# Altium PCB Retro_Stat_PCB_Layout.PcbDoc (part 1 of 2)
Units mil, origin at the board's own origin, x right, y up, seen from the top; angles counter-clockwise.
Board outline 2340 x 2340 mil, 4 copper layers (Top Layer, Vcc, Gnd, Bottom Layer), stack 60.834 mil thick; 70 components, 57 nets, 289 pads, 146 vias.
Unrouted connection lines stored in the file: 1.
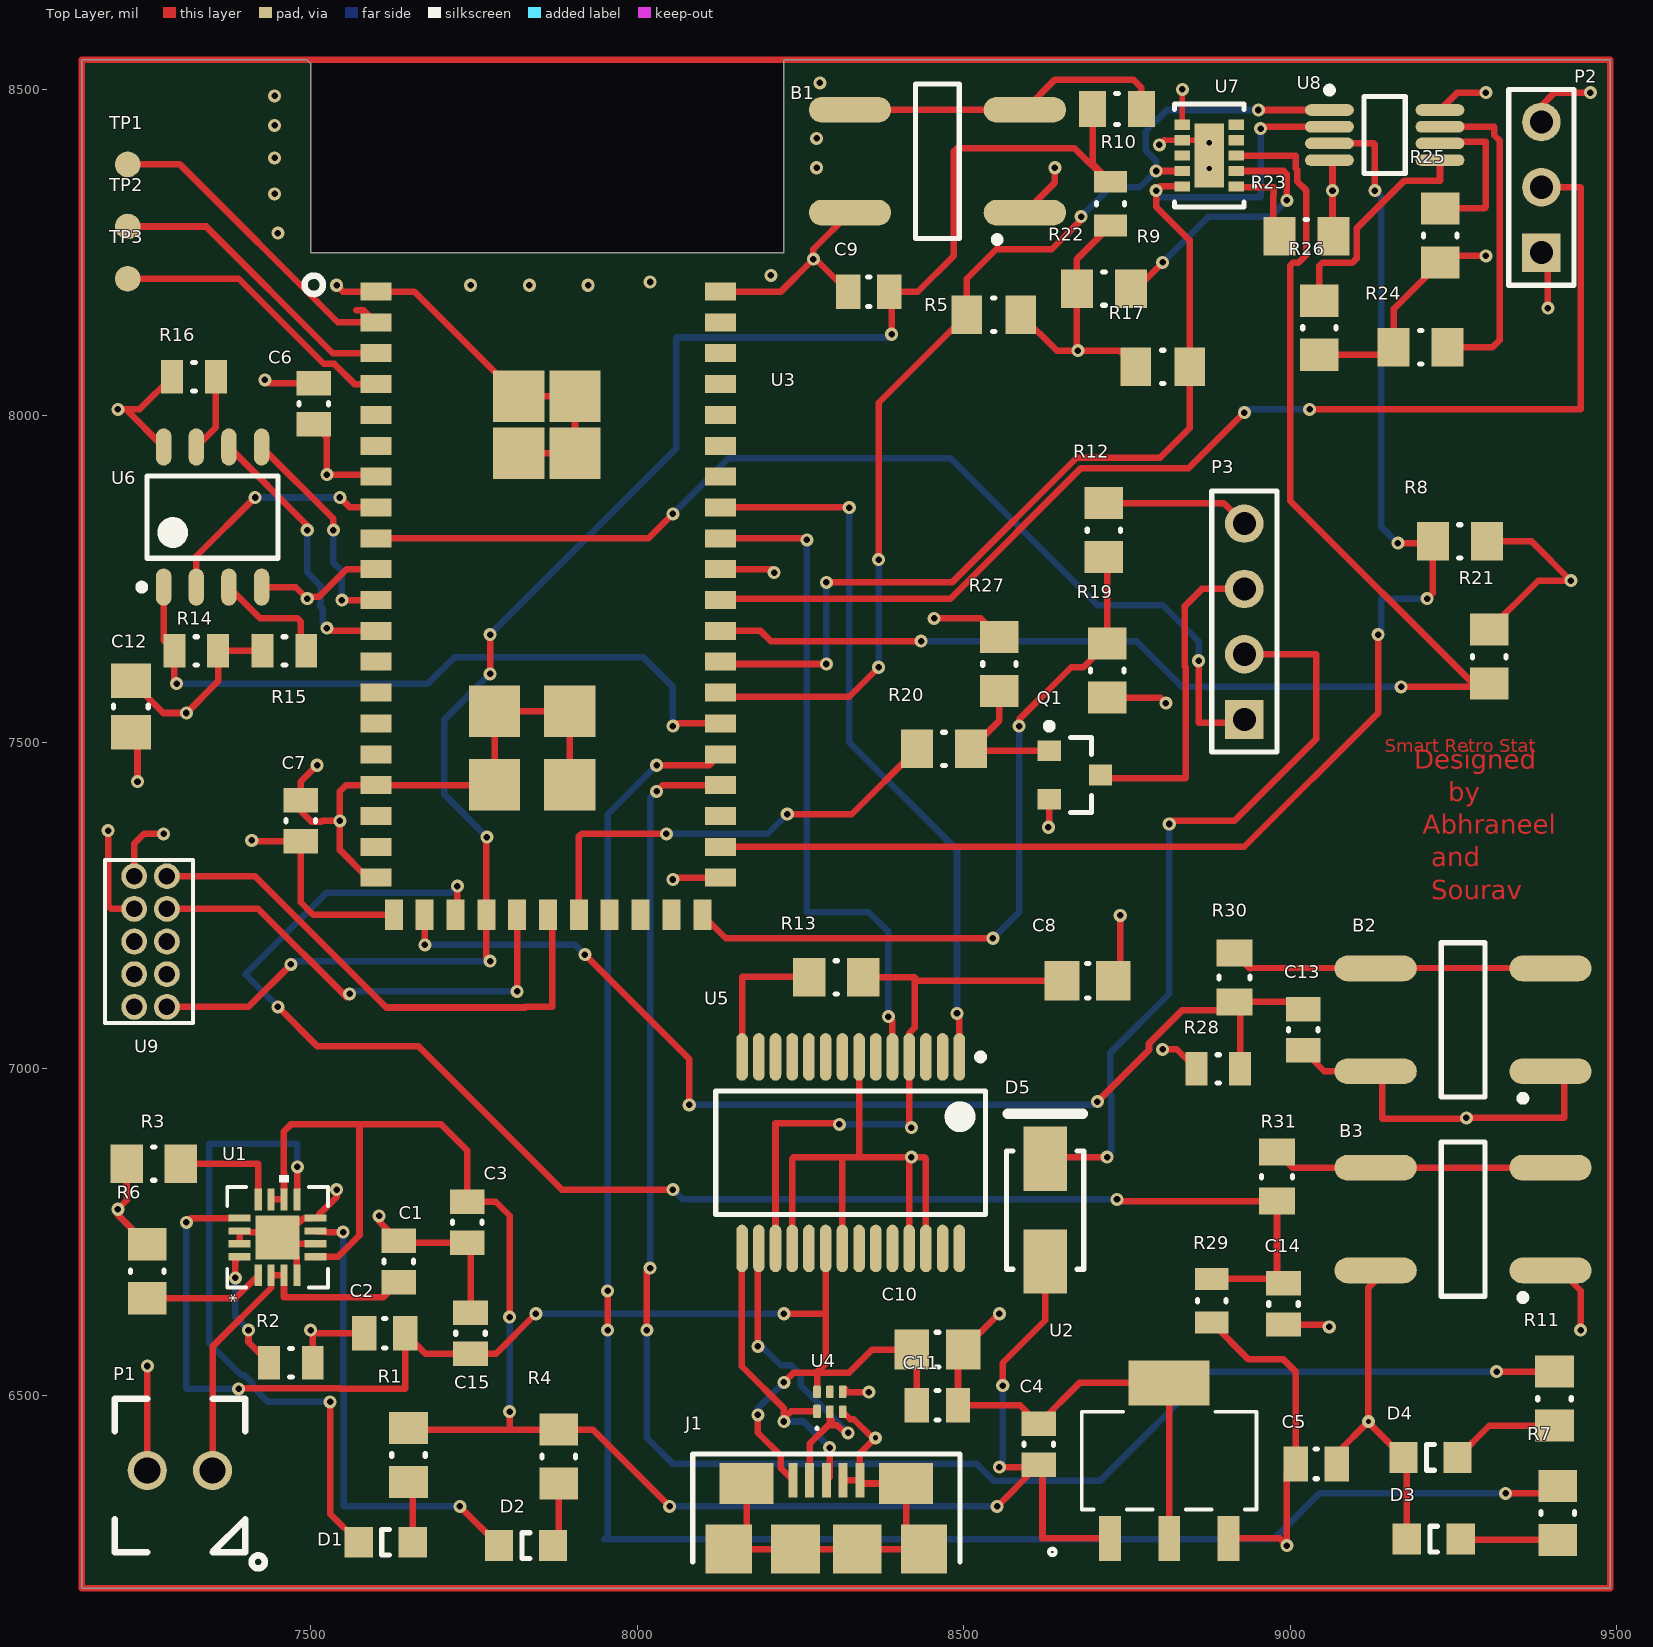
[diagram p0: Top Layer view]
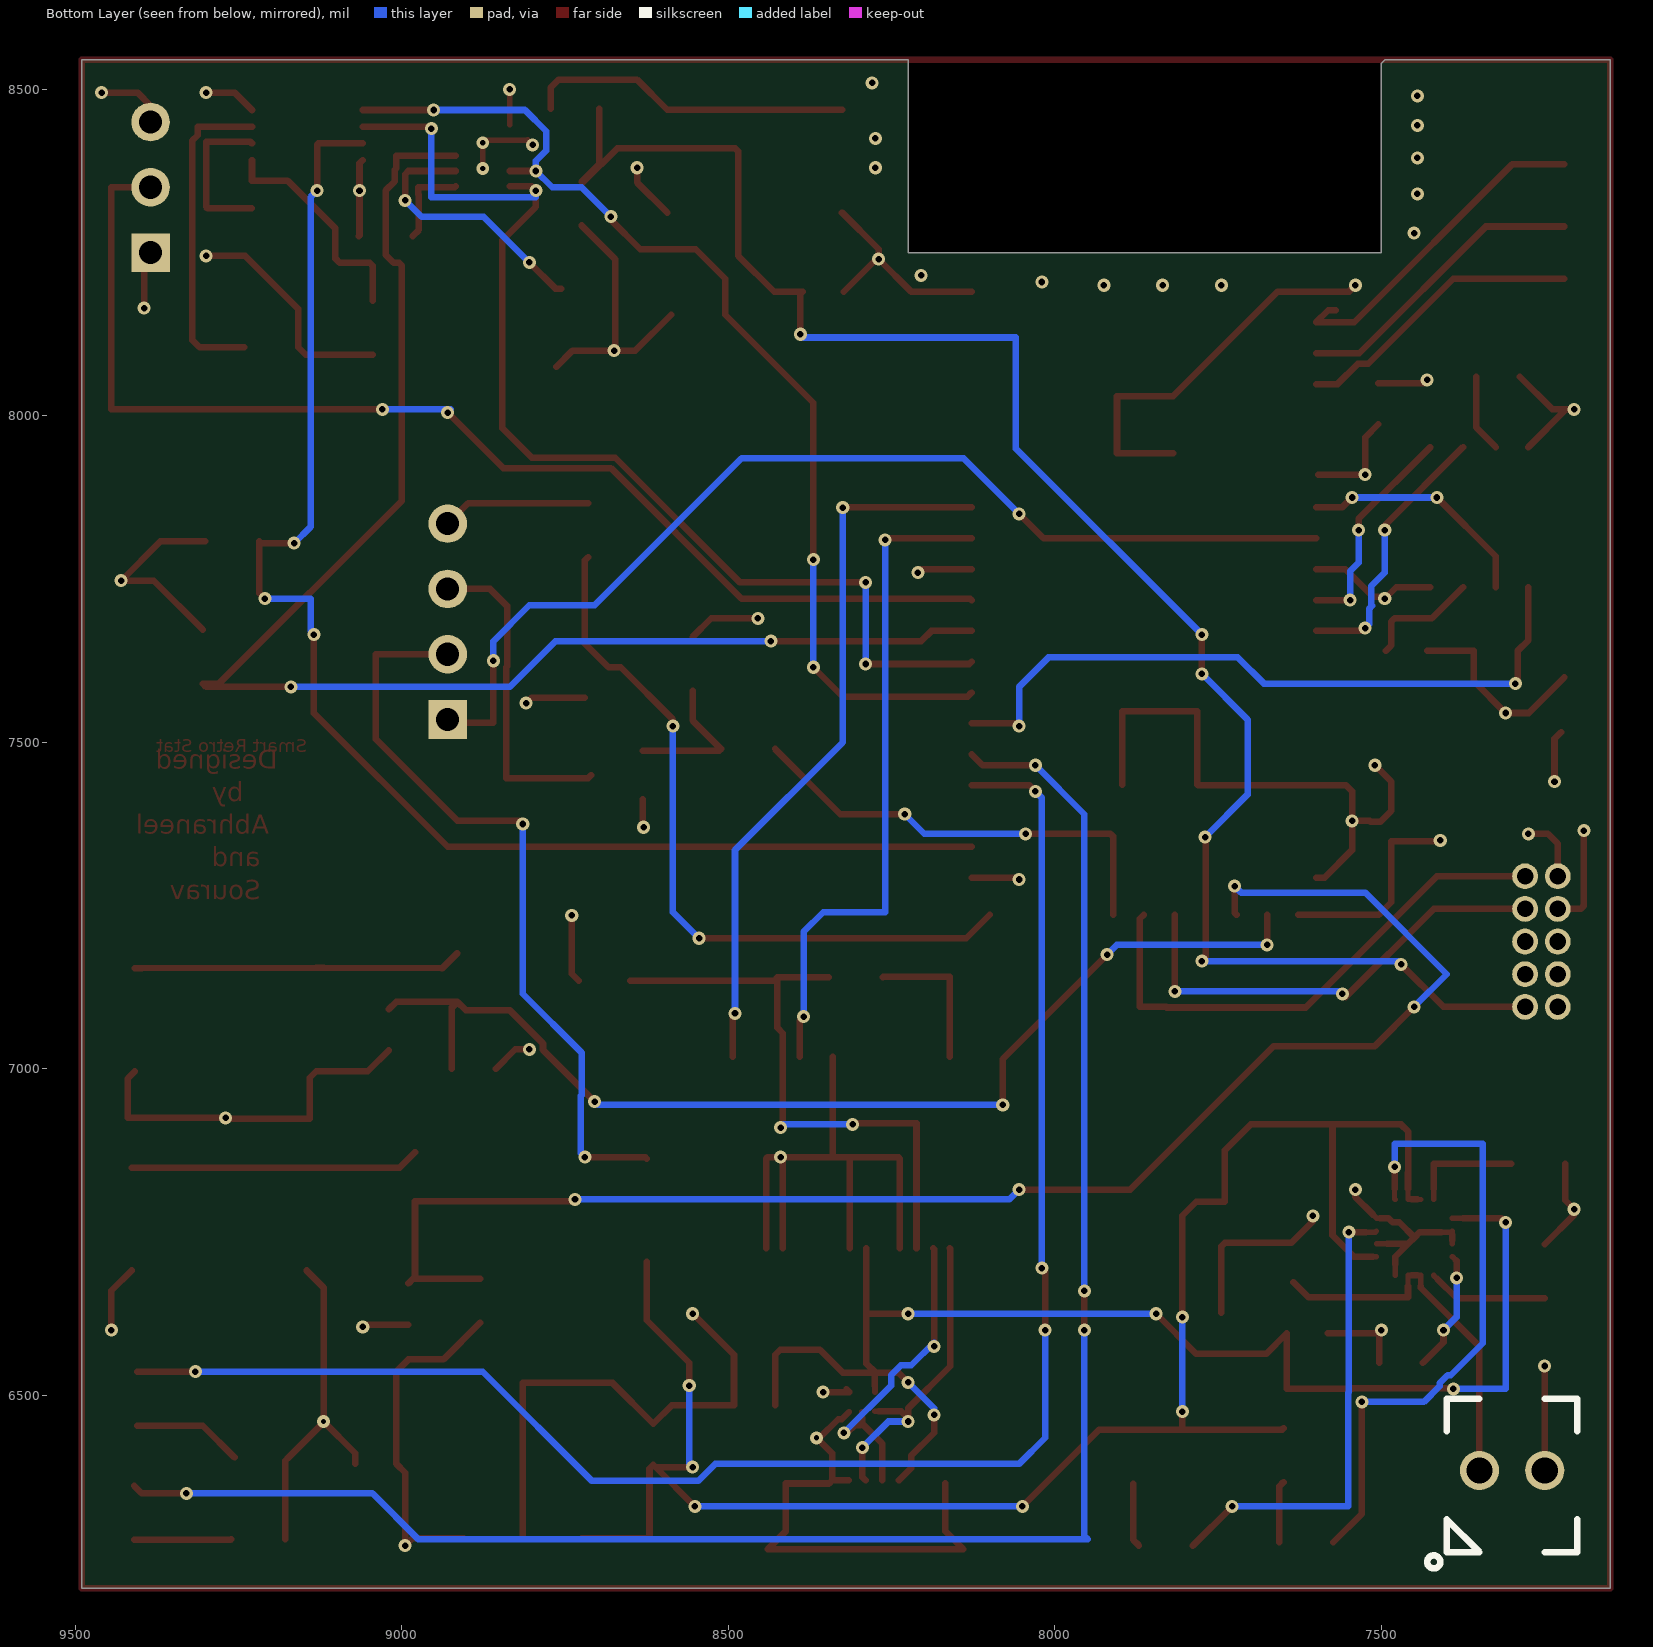
[diagram p1: Bottom Layer view, seen from below]
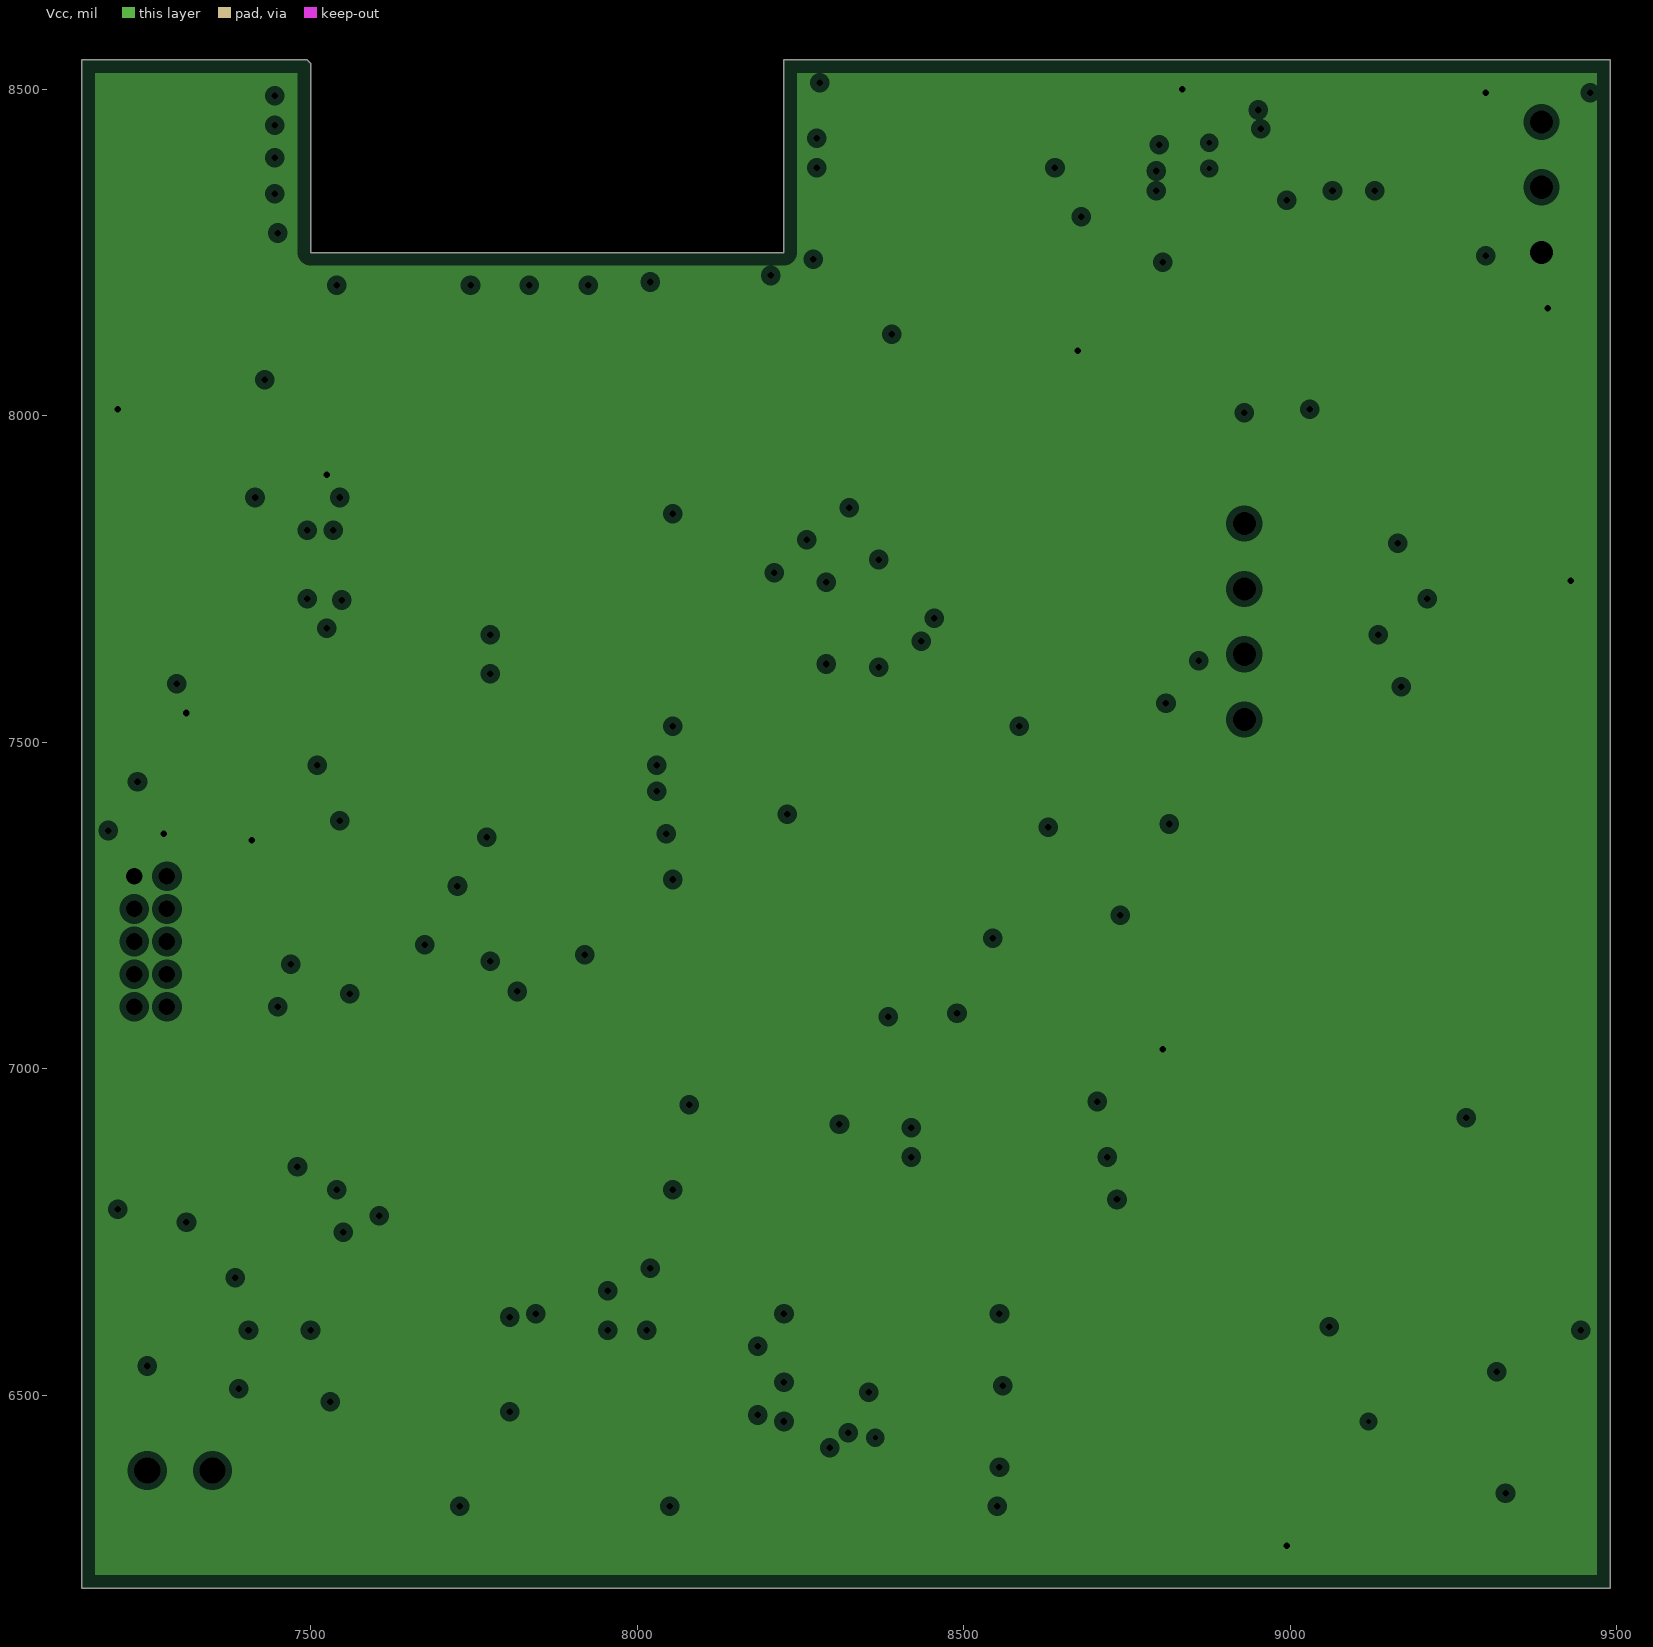
[diagram p2: Vcc, clearances drawn from the general rule]
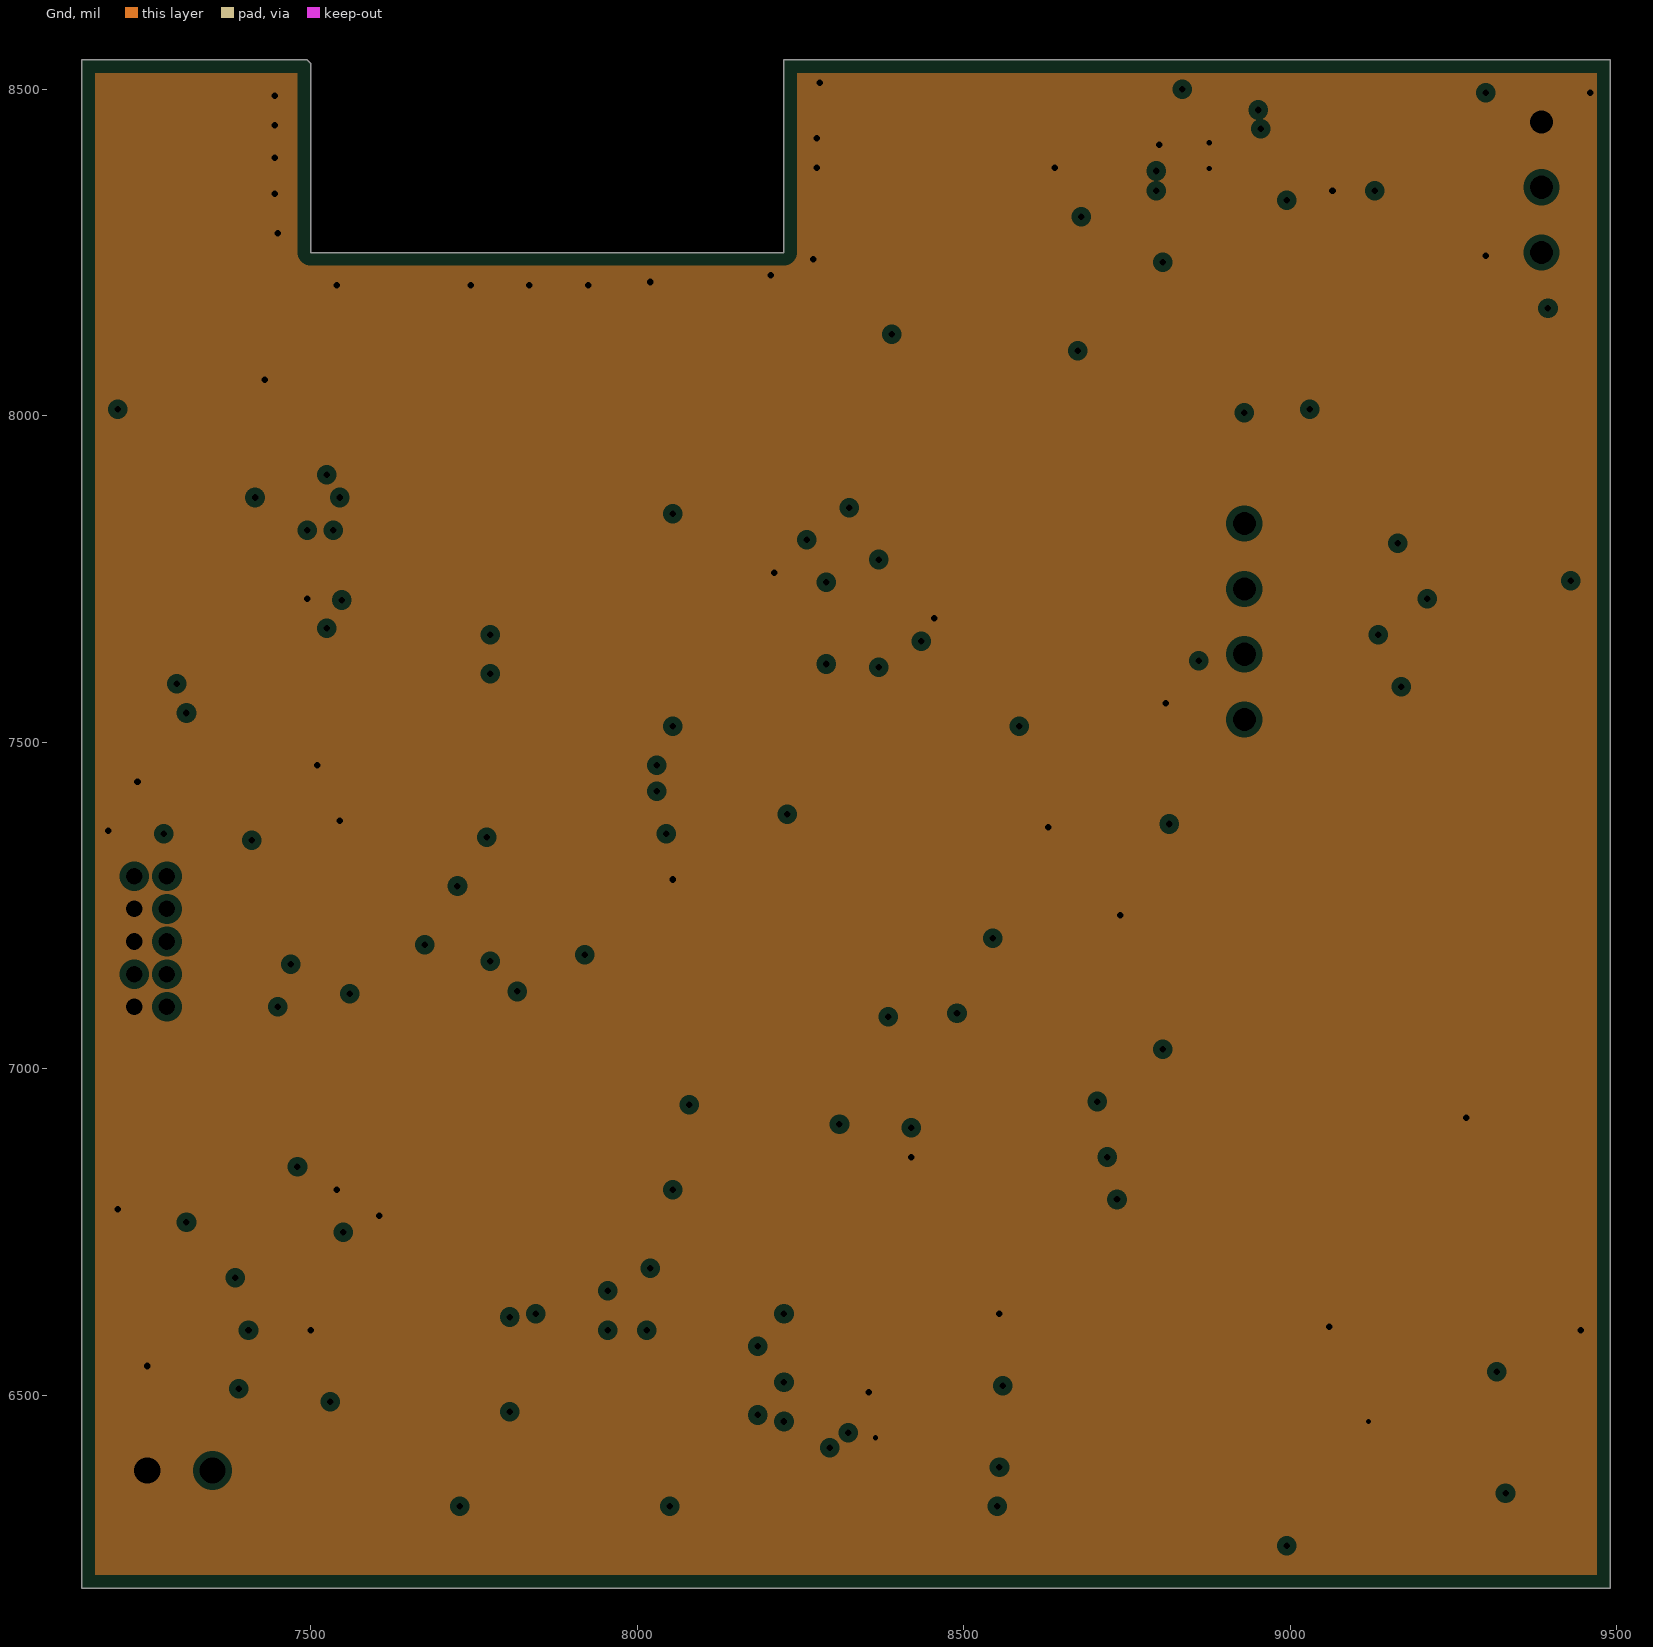
[diagram p3: Gnd, clearances drawn from the general rule]

## Layer stack, top to bottom
Top Solder: solder mask 1, Solder Resist, Dk 3.5
Top Layer: signal copper 1.5
Dielectric1: core 25, FR-4 Prepreg, Dk 4.2
Vcc: plane copper 1.417, net 3.3Vout
Dielectric 2: prepreg 5, Dk 4.2
Gnd: plane copper 1.417, net Gnd
Dielectric 3: core 25, Dk 4.2
Bottom Layer: signal copper 1.5
Bottom Solder: solder mask 1, Solder Resist, Dk 3.5

## Board outline
7495,8545 7500,8540 7500,8250 8225,8250 8225,8545 9490,8545 9490,6205 7150,6205 7150,8545

## Design rules (kind name [scope] priority, off if disabled: settings)
AcuteAngle [All] p1: minimum=6.00000000000000E+0001 checktracksonly=FALSE
AssemblyTestPointUsage [All] p1: allowmultiple=TRUE
AssemblyTestpoint [All] p1: testpointundercomponent=TRUE minsize=30 maxsize=100 preferedsize=60 minholesize=0 maxholesize=40 preferedholesize=32 testpointgrid=1 usegrid=FALSE gridtolerance=0.01 allowsidebottom=TRUE
BoardOutlineClearance [All] p1: gap=10 ignorepadtopadclearanceinfootprint=FALSE except(100: SMDPad-OutlineEdge SMDPad-CavityEdge SMDPad-CutoutEdge THPad-OutlineEdge THPad-CavityEdge THPad-CutoutEdge)
Clearance [All] p1: gap=6 ignorepadtopadclearanceinfootprint=FALSE except(10: SMDPad-THPad)
FabricationTestPointUsage [All] p1: valid=0 allowmultiple=TRUE
FabricationTestpoint [All] p1: side=2 testpointundercomponent=TRUE minsize=30 maxsize=100 preferedsize=60 minholesize=0 maxholesize=40 preferedholesize=32 testpointgrid=1 allowsidebottom=TRUE usegrid=FALSE gridtolerance=0.01
HoleSize [All] p1: absolutevalues=TRUE maxlimit=100 minlimit=8 maxpercent=80.000 minpercent=20.000
MinimumAnnularRing [All] p1: minimumring=6
MinimumSolderMaskSliver [All] p1: minsoldermaskwidth=4
PlaneClearance [All] p1: clearance=10
PlaneConnect [All] p1: planeconnectstyle=Relief reliefexpansion=20 reliefentries=4 reliefconductorwidth=10 reliefairgap=10
PolygonConnect [All] p1: connectstyle=Relief reliefconductorwidth=10 reliefentries=4 polygonreliefangle="90 Angle" airgapwidth=10
RoutingVias [All] p1: holewidth=10 width=20 viastyle="Through Hole" minholewidth=8 minwidth=20 maxholewidth=10 maxwidth=50
SMDNeckDown [All] p1: percent=75.000
SMDToCorner [All] p1: distance=0
SMDToPlane [All] p1: distance=0
SilkToSilkClearance [All] p1: silktosilkclearance=0
SilkToSolderMaskClearance [IsPad] p1: minsilkscreentomaskgap=0 clearancetoexposedcopper=TRUE
SolderMaskExpansion [All] p1: expansion=4
UnRoutedNet [All] p1: checkbadconnections=TRUE
ViasUnderSMD [All] p1: allowed=FALSE
Width [All] p1: maxlimit=1000 minlimit=6 preferedwidth=10
19 further rules are at their usual default settings.

## Classes and differential pairs
component class Power: C1 C2 C3 C4 C5 C15 D1 D2 J1 P1 R1 R2 R3 R4 R6 U1 U2 U4 U9
component class Sensors_Actuator_lib: B2 B3 C13 C14 D3 D4 D5 P2 P3 Q1 R5 R7 R8 R11 R12 R17 R19 R20 R21 R22 R23 R24 R25 R26 R27 R28 R29 R30 R31 U7 U8
component class WIFI_module: B1 C6 C7 C8 C9 C10 C11 C12 R9 R10 R13 R14 R15 R16 TP1 TP2 TP3 U3 U5 U6

## Components (designator, comment, footprint, x,y, rotation, side; value= is the part's Value field where it differs from the comment)
B1 "EVQ-Q2203W" EVQ-Q2203W 8460,8390 r180 top
B2 "EVQ-Q2203W" EVQ-Q2203W 9265,7075 r180 top
B3 "EVQ-Q2203W" EVQ-Q2203W 9265,6770 r180 top
C1 "4.7uF" CAPC0805(2012)155_L 7635,6705 r270 top
C2 "100nF" CAPC0805(2012)100_L 7613.5,6595 r0 top
C3 "4.7uF" CAPC0805(2012)155_L 7740,6765 r90 top
C4 "1uF" CAPC0805(2012)100_L 8615,6425 r270 top
C5 "4.7uF" CAPC0805(2012)155_L 9040,6395 r180 top
C6 "10uF" CAPC0805(2012)100_L 7505,8018.5 r270 top
C7 "10uF" CAPC0805(2012)100_L 7485,7380 r270 top
C8 "100nF" CAPC0805(2012)145_M 8690,7135 r180 top
C9 "4.7nF" CAPC0805(2012)100_L 8355,8190 r0 top
C10 "100nF" CAPC0805(2012)145_M 8460,6570 r180 top
C11 "4.7uF" CAPC0805(2012)155_L 8460,6485 r180 top
C12 "100nF" CAPC0805(2012)145_M 7225,7555 r90 top
C13 "4.7nF" CAPC0805(2012)100_L 9020,7060 r90 top
C14 "4.7nF" CAPC0805(2012)100_L 8990,6640 r90 top
C15 "10uF" CAPC0805(2012)100_L 7745,6595 r270 top
D1 "150080GS75000" 0805_A 7615,6275 r0 top
D2 "150080GS75000" 0805_A 7830,6270 r0 top
D3 "150080GS75000" 0805_A 9220,6280 r0 top
D4 "150080GS75000" 0805_A 9215,6405 r0 top
D5 "B340A-13-F" DIOD-SMA-2_V 8625,6783.74 r90 top
J1 "Micro-USB" 10118192-0001LF 8290,6264.69 r0 top
P1 "640456-2" 640456-2 7300,6385 r180 top
P2 "PIR_Header" HDR1X3 9385,8250 r90 top
P3 "Servo_Header" HDR1X4 8930,7535 r90 top
Q1 "NVTR4503NT1G" ONSC-SOT-23-3-318-08_V 8670.63,7450 r0 top
R1 "1K5" RESC0805(2012)_M 7650,6408.66 r90 top value="1500.00 Ohm"
R2 "1K13" RESC0805(2012)_L 7470,6550 r0 top value="1130.00 Ohm"
R3 "1K18" RESC0805(2012)_M 7260,6855 r180 top value="1180.00 Ohm"
R4 "1K5" RESC0805(2012)_M 7880,6406.34 r90 top value="1500.00 Ohm"
R5 "4.7K" RESC2113X50X35ML15T15 8546.34,8155 r0 top
R6 "10K" RESC0805(2012)_M 7250,6690 r270 top value="10000.00 Ohm"
R7 "1K5" RESC0805(2012)_M 9410,6320 r90 top value="1500.00 Ohm"
R8 "10K" RESC0805(2012)_M 9260,7807.68 r0 top value="10000.00 Ohm"
R9 "100K" RESC0805(2012)_L 8725,8325 r90 top value="100000.00 Ohm"
R10 "39R" RESC0805(2012)_N 8735,8470 r0 top value="39.00 Ohm"
R11 "1K5" RESC0805(2012)_M 9405,6495 r90 top value="1500.00 Ohm"
R12 "10K" RESC0805(2012)_M 8715,7825 r90 top value="10000.00 Ohm"
R13 "10K" RESC0805(2012)_M 8305,7140 r0 top value="10000.00 Ohm"
R14 "100K" RESC0805(2012)_L 7325,7640 r180 top value="100000.00 Ohm"
R15 "100K" RESC0805(2012)_L 7460,7640 r0 top value="100000.00 Ohm"
R16 "100K" RESC0805(2012)_L 7321.54,8060 r0 top value="100000.00 Ohm"
R17 "4.7K" RESC2113X50X35ML15T15 8805,8075 r180 top
R19 "10K" RESC0805(2012)_M 8720,7610 r90 top value="10000.00 Ohm"
R20 "4K7" RESC0805(2012)_M 8470,7490 r180 top value="4700.00 Ohm"
R21 "10K" RESC0805(2012)_M 9305,7631.34 r90 top value="10000.00 Ohm"
R22 "10K" RESC0805(2012)_M 8715,8195 r180 top value="10000.00 Ohm"
R23 "10K" RESC0805(2012)_M 9025,8275 r180 top value="10000.00 Ohm"
R24 "10K" RESC0805(2012)_M 9200,8105 r0 top value="10000.00 Ohm"
R25 "10K" RESC0805(2012)_M 9230,8276.34 r90 top value="10000.00 Ohm"
R26 "10K" RESC0805(2012)_M 9045,8135 r90 top value="10000.00 Ohm"
R27 "10K" RESC0805(2012)_M 8555,7620 r270 top value="10000.00 Ohm"
R28 "100K" RESC0805(2012)_L 8890,7000 r0 top value="100000.00 Ohm"
R29 "100K" RESC0805(2012)_L 8880,6645 r90 top value="100000.00 Ohm"
R30 "39R" RESC0805(2012)_N 8915,7140 r90 top value="39.00 Ohm"
R31 "39R" RESC0805(2012)_N 8980,6835 r90 top value="39.00 Ohm"
TP1 "" TP-SM-C-100 7220,8385 r0 top
TP2 "" TP-SM-C-100 7220,8290 r90 top
TP3 "" TP-SM-C-100 7220,8210 r90 top
U1 "BQ24075TRGTR" RGT16_1P7X1P7 7449.53,6741.93 r90 top value=Value
U2 "AP7361-33E-13" SOT-223 8815,6400 r0 top value=Value
U3 "SAMW25H18-MR510PB" SAMW25H18-MR510PB 7863.87,7713.25 r90 top
U4 "TPD4S012DRYR" DRY0006A 8295.32,6490.16 r90 top
U5 "FT232RL" FTDI-SSOP-28_M 8327.2,6871.65 r270 top
U6 "AT25DF081A-SSH-T" AT25DF081A-SSH-T 7350,7845 r90 top
U7 "CCS811" AMS-LGA-10_V 8876.34,8398.62 r180 top
U8 "MCP9808T-E/MS" MCHP-MSOP-MS8_M 9145,8430 r0 top
U9 "20021111-00010T4LF" 20021111-00010T4LF 7280,7195 r270 top

## Footprints (in the part's own frame and the unit in brackets; to place one, negate y for a bottom-side part, rotate by r counter-clockwise, add the part's x,y. Pads: shape width x height; smd on the part's side, far side on the other; paste and mask are expansions set on the pad)
0805_A [mm] "Chip LED, 2-Leads, Body 2.0x1.3mm, IPC Medium Density"
  rect 1.1x1.2 smd: 1(-1.05,0) 2(1.05,0)
  silkscreen extent -0.15,-0.5 0.15,0.5, body extent -1,-0.62 1,0.63, height 0.68
640456-2 [mil] "CONN HEADER VERT 2POS .100 TIN"
  round 60 hole 40.16: 1(-50,0) 2(50,0)
  silkscreen extent -130,-110 100,150, body extent -100,-107 100,123, height 395
10118192-0001LF [mm]
  rect 0.35x1.35 smd: 1(-1.3,2.675) 2(-0.65,2.675) 3(0,2.675) 4(0.65,2.675) 5(1.3,2.675)
  rect 1.8x1.9 smd: 6(-3.8,0) 6(3.8,0)
  rect 2.1x1.6 smd: 6(-3.1,2.55) 6(3.1,2.55)
  rect 1.9x1.9 smd: 6(-1.2,0) 6(1.2,0)
  silkscreen extent -5.2,-0.5 5.2,3.7, body extent -3.96,-2.76 3.96,2.9, height 2.79
20021111-00010T4LF [mil] "CONN HEADER 10POS UNSHD VERT T/H"
  round 39.6 hole 25.6: 1(-100,-50) 2(-100,0) 3(-50,-50) 4(-50,0) 5(0,-50) 6(0,0) 7(50,-50) 8(50,0) 9(100,-50) 10(100,0)
  silkscreen extent -125,-95 125,40, body extent -125,-92 125,42, height 217
AMS-LGA-10_V [mm] "SON, 10-Leads, Body 4x2.7mm, Pitch 0.6mm, Thermal Pad 2.5x1.3mm"
  rect 0.6x0.4 smd: 1(-1.05,1.2) 2(-1.05,0.6) 3(-1.05,0) 4(-1.05,-0.6) 5(-1.05,-1.2) 6(1.05,-1.2) 7(1.05,-0.6) 8(1.05,0) 9(1.05,0.6) 10(1.05,1.2)
  rect 1.148x2.5 smd: 11(0,0)
  silkscreen extent -1.8,-2 1.35,2, body extent -1.35,-2 1.35,2, height 1.1
AT25DF081A-SSH-T [mm] "IC FLASH 8MBIT 100MHZ 8SOIC"
  oval 1.45x0.6 smd: 1(-2.725,1.905) 2(-2.725,0.635) 3(-2.725,-0.635) 4(-2.725,-1.905) 5(2.725,-1.905) 6(2.725,-0.635) 7(2.725,0.635) 8(2.725,1.905)
  silkscreen extent -2.85,-2.55 1.6,2.88, body extent -3,-2.55 3,2.55, height 1.75
CAPC0805(2012)100_L [mm] "Chip Capacitor, Body 2.0x1.2mm, Height 1.0mm, IPC High Density"
  rect 0.95x1.35 smd: 1(-0.8,0) 2(0.8,0)
  silkscreen extent -0.05,-0.58 0.05,0.58, body extent -1.1,-0.72 1.1,0.72, height 1
CAPC0805(2012)145_M [mm] "Chip Capacitor, Body 2.0x1.2mm, Height 1.45mm, IPC Low Density"
  rect 1.35x1.55 smd: 1(-1,0) 2(1,0)
  silkscreen extent -0.05,-0.67 0.05,0.67, body extent -1.1,-0.72 1.1,0.72, height 1.45
CAPC0805(2012)155_L [mm] "Chip Capacitor, Body 2.0x1.2mm, Height 1.55mm, IPC High Density"
  rect 0.95x1.35 smd: 1(-0.8,0) 2(0.8,0)
  silkscreen extent -0.05,-0.58 0.05,0.58, body extent -1.1,-0.72 1.1,0.72, height 1.55
DIOD-SMA-2_V [mm] "Molded Diode, 2-Leads, Body 4.6x2.92mm"
  rect 2.5x1.7 smd: 1(-2,0) 2(2,0)
  silkscreen extent -2.3,-1.5 3.75,1.5, body extent -2.52,-1.46 2.52,1.46, height 2.4
DRY0006A [mm] "SON, 6-Leads, Body 1.45x1mm, Pitch 0.5mm"
  rrect33% 0.52x0.3 smd: 1(-0.37,0.5)
  rrect33% 0.49x0.3 smd: 2(-0.385,0) 3(-0.385,-0.5) 4(0.385,-0.5) 5(0.385,0) 6(0.385,0.5)
  silkscreen extent -1.08,0.45 -0.98,0.55, body extent -0.5,-0.72 0.5,0.72, height 0.6
EVQ-Q2203W [mm] "SWITCH TACTILE SPST-NO 0.02A 15V, SOJ, 4-Leads, Body 6.00x6.60mm, Pitch 4.00mm, IPC Medium Density"
  oval 3.2x1 smd: 1(-3.4,2) 2(3.4,2) 3(-3.4,-2) 4(3.4,-2)
  silkscreen extent -2.45,-3 0.85,3.17, body extent -3.28,-2.93 3.32,3.08, height 3.11
FTDI-SSOP-28_M [mm] "SOP, 28-Leads, Body 10.5x5.6mm, Pitch 0.65mm, IPC Low Density"
  oval 1.85x0.45 smd: 1(-3.725,4.225) 2(-3.725,3.575) 3(-3.725,2.925) 4(-3.725,2.275) 5(-3.725,1.625) 6(-3.725,0.975) 7(-3.725,0.325) 8(-3.725,-0.325) 9(-3.725,-0.975) 10(-3.725,-1.625) 11(-3.725,-2.275) 12(-3.725,-2.925) 13(-3.725,-3.575) 14(-3.725,-4.225) 15(3.725,-4.225) 16(3.725,-3.575) 17(3.725,-2.925) 18(3.725,-2.275) 19(3.725,-1.625) 20(3.725,-0.975) 21(3.725,-0.325) 22(3.725,0.325) 23(3.725,0.975) 24(3.725,1.625) 25(3.725,2.275) 26(3.725,2.925) 27(3.725,3.575) 28(3.725,4.225)
  silkscreen extent -3.85,-5.25 2.4,5.25, body extent -3.9,-5.25 3.9,5.25, height 2
HDR1X3 [mm] "Connector; Header; 3 Position"
  rect 1.5x1.5 hole 0.9: 1(0,0)
  round 1.5 hole 0.9: 2(2.54,0) 3(5.08,0)
  silkscreen extent -1.27,-1.27 6.35,1.27
HDR1X4 [mm] "Connector; Header; 4 Position"
  rect 1.5x1.5 hole 0.9: 1(0,0)
  round 1.5 hole 0.9: 2(2.54,0) 3(5.08,0) 4(7.62,0)
  silkscreen extent -1.27,-1.27 8.89,1.27
MCHP-MSOP-MS8_M [mm] "SOP, 8-Leads, Body 3x3mm, Pitch 0.65mm, IPC Low Density"
  oval 1.9x0.45 smd: 1(-2.15,0.975) 2(-2.15,0.325) 3(-2.15,-0.325) 4(-2.15,-0.975) 5(2.15,-0.975) 6(2.15,-0.325) 7(2.15,0.325) 8(2.15,0.975)
  silkscreen extent -2.27,-1.5 0.8,1.87, body extent -1.5,-1.5 1.5,1.5, height 1.1
ONSC-SOT-23-3-318-08_V [mm] "SOT23, 3-Leads, Body 2.92x1.3mm, Pitch 0.95mm"
  rect 0.9x0.8 smd: 1(-1,0.95) 2(-1,-0.95) 3(1,0)
  silkscreen extent -1.12,-1.46 0.65,2.02, body extent -0.65,-1.46 0.65,1.46, height 1.11
RESC0805(2012)_L [mm] "Chip Resistor, Body 2.0x1.3mm, IPC High Density"
  rect 0.85x1.3 smd: 1(-0.85,0) 2(0.85,0)
  silkscreen extent -0.05,-0.55 0.05,0.55, body extent -1.1,-0.67 1.1,0.68, height 0.7
RESC0805(2012)_M [mm] "Chip Resistor, Body 2.0x1.3mm, IPC Low Density"
  rect 1.25x1.5 smd: 1(-1.05,0) 2(1.05,0)
  silkscreen extent -0.05,-0.65 0.05,0.65, body extent -1.1,-0.67 1.1,0.67, height 0.7
RESC0805(2012)_N [mm] "Chip Resistor, Body 2.0x1.3mm, IPC Medium Density"
  rect 1.05x1.4 smd: 1(-0.95,0) 2(0.95,0)
  silkscreen extent -0.05,-0.6 0.05,0.6, body extent -1.1,-0.67 1.1,0.68, height 0.7
RESC2113X50X35ML15T15 [mm] "Chip Resistor, 2-Leads, Body 2.2x1.4mm, IPC Low Density"
  rect 1.2x1.5 smd: 1(-1.05,0) 2(1.05,0)
  silkscreen extent -0.05,-0.65 0.05,0.65, body extent -1.1,-0.7 1.1,0.7, height 0.5
RGT16_1P7X1P7 [mm]
  rect 0.85x0.28 smd paste-0.14 mask+0: 1(-1.475,0.75) 2(-1.475,0.25) 3(-1.475,-0.25) 4(-1.475,-0.75) 9(1.475,-0.75) 10(1.475,-0.25) 11(1.475,0.25) 12(1.475,0.75)
  rect 0.28x0.85 smd paste-0.14 mask+0: 5(-0.75,-1.475) 6(-0.25,-1.475) 7(0.25,-1.475) 8(0.75,-1.475) 13(0.75,1.475) 14(0.25,1.475) 15(-0.25,1.475) 16(-0.75,1.475)
  rect 1.7x1.7 smd paste-0.837 mask-0.838: 17(0,0)
  silkscreen extent -1.96,-1.96 2.41,1.96, body extent 0,0 0.25,0.25, height 0.25
SAMW25H18-MR510PB [mm] "RF TXRX MODULE WIFI TRACE ANT"
  rect 2x2 smd: 0(-7.066,-0.839) 0(-7.066,2.085) 0(-4.211,-0.839) 0(-4.211,2.085) 0(5.828,-1.045) 0(5.828,1.137) 0(8.046,-1.045) 0(8.046,1.137)
  rect 0.7x1.2 smd: 1(12.121,6.7) 2(10.921,6.7) 3(9.72,6.7) 4(8.52,6.7) 5(7.32,6.7) 6(6.12,6.7) 7(4.92,6.7) 8(3.72,6.7) 9(2.52,6.7) 10(1.32,6.7) 11(0.12,6.7) 12(-1.08,6.7) 13(-2.279,6.7) 14(-3.479,6.7) 15(-4.679,6.7) 16(-5.879,6.7) 17(-7.079,6.7) 18(-8.279,6.7) 19(-9.479,6.7) 20(-10.679,6.7) 32(-10.679,-6.7) 33(-9.479,-6.7) 34(-8.279,-6.7) 35(-7.079,-6.7) 36(-5.879,-6.7) 37(-4.679,-6.7) 38(-3.479,-6.7) 39(-2.279,-6.7) 40(-1.079,-6.7) 41(0.12,-6.7) 42(1.32,-6.7) 43(2.52,-6.7) 44(3.72,-6.7) 45(4.92,-6.7) 46(6.12,-6.7) 47(7.32,-6.7) 48(8.52,-6.7) 49(9.72,-6.7) 50(10.921,-6.7) 51(12.121,-6.7)
  rect 1.2x0.7 smd: 21(-12.12,6.004) 22(-12.12,4.804) 23(-12.12,3.604) 24(-12.12,2.404) 25(-12.12,1.204) 26(-12.12,0.004) 27(-12.12,-1.196) 28(-12.12,-2.396) 29(-12.12,-3.596) 30(-12.12,-4.796) 31(-12.12,-5.996)
  silkscreen extent 12.02,8.76 12.74,9.47, body extent -12.89,-7.45 20.98,7.46, height 3.37
SOT-223 [mm]
  rect 0.851x1.761 smd paste+0 mask+0: 1(-2.3,-3.025) 2(0,-3.025) 3(2.3,-3.025)
  rect 3.151x1.761 smd paste+0 mask+0: 4(0,3.025)
  silkscreen extent -4.67,-3.68 3.4,1.9, body extent 0,0 0.25,0.25, height 0.25
TP-SM-C-100 [mm] "Test Point, Surface Mounting, Circular, Pad Diameter 1mm"
  round 1 smd: 1(0,0)

## Part data
B1 B2 B3: "SWITCH TACTILE SPST-NO 0.02A 15V", Contact Rating @ Voltage="0.02A @ 15VDC", Illumination Type, Color=-, Manufacturer="Panasonic Electronic Components", Operating Force=350gf, Operating Temperature="-40°C ~ 85°C", Supplier Part Number 1=P12964SCT-ND, Actuator Height off PCB, Vertical=3.10mm, Actuator Length, Right Angle=-, Actuator Material=-, Actuator Orientation="Top Actuated", Actuator Type=Standard, Category=Switches, Circuit=SPST-NO, ComponentLink1Description=https://industrial.panasonic.com/cdbs/www-data/pdf/ATK0000/ATK0000CE28.pdf, ComponentLink1URL=https://industrial.panasonic.com/cdbs/www-data/pdf/ATK0000/ATK0000CE28.pdf, Features="Grounding Pin", Illumination=Non-Illuminated, Illumination Voltage (Nominal)=-, Ingress Protection=-, Manufacturer Part Number=EVQ-Q2203W, Mechanical Life="100,000 Cycles", Mounting Type="Surface Mount", Outline="6.60mm x 6.00mm", Packaging="Cut Tape (CT)", Part Status=Active, Pricing 1="1=0.3, 10=0.287, 25=0.2772, 50=0.2674, 100=0.2525, 250=0.2376, 500=0.2277, 1000=0.17325 (USD)", RoHS="RoHS Compliant", Stock 1=15024, Supplier 1=Digi-Key, Switch Function=Off-Mom, Switch Travel=0.25mm, Termination Style="J Lead"
C1 C3 C5 C11: library part CMP-1036-04882-1, "CAP 4.7uF 10V ±10% 0805 (2012 Metric) Thickness 1.55mm SMD", Case-EIA=0805, Case-Metric=2012, Rated Voltage="10 V", Tolerance=±10%, Max Thickness="1.55 mm", Technology=SMT
C2: library part CMP-1036-04407-1, "CAP 100nF 16V -20% to +80% 0805 (2012 Metric) Thickness 1mm SMD", Case-EIA=0805, Case-Metric=2012, Rated Voltage="16 V", Tolerance="-20% to +80%", Max Thickness="1 mm", Technology=SMT
C4: library part CMP-1036-04734-1, "CAP 1uF 6.3V ±20% 0805 (2012 Metric) Thickness 1mm SMD", Case-EIA=0805, Case-Metric=2012, Rated Voltage="6.3 V", Tolerance=±20%, Max Thickness="1 mm", Technology=SMT
C6 C7 C15: library part CMP-1036-04930-1, "CAP 10uF 16V ±20% 0805 (2012 Metric) Thickness 1mm SMD", Case-EIA=0805, Case-Metric=2012, Rated Voltage="16 V", Tolerance=±20%, Max Thickness="1 mm", Technology=SMT
C8 C10 C12: library part CMP-1036-04404-1, "CAP 100nF 16V ±20% 0805 (2012 Metric) Thickness 1.45mm SMD", Case-EIA=0805, Case-Metric=2012, Rated Voltage="16 V", Tolerance=±20%, Max Thickness="1.45 mm", Technology=SMT
C9 C13 C14: library part CMP-1036-03568-1, "CAP 4.7nF 16V ±20% 0805 (2012 Metric) Thickness 1mm SMD", Case-EIA=0805, Case-Metric=2012, Rated Voltage="16 V", Tolerance=±20%, Max Thickness="1 mm", Technology=SMT
D1 D2 D3 D4: library part CMP-1426-00007-1, "SMD mono-color Chip LED, WL-SMCW, Green", Color=Green, Manufacturer="Wuerth Elektronik", ComponentLink1Description="Manufacturer URL", ComponentLink1URL=http://www.we-online.com, ComponentLink2Description=Datasheet, ComponentLink2URL=http://katalog.we-online.com/led/datasheet/150080GS75000.pdf, PackageReference=0805_A, PartNumber=150080GS75000
D5: library part CMP-1667-00003-1, "Surface Mount Schottky Barrier Rectifier, 40 V, 3 A, -55 to 150 degC, 2-Pin SMA, RoHS, Tape and Reel", Case\Package=SMA, Forward Current="3 A", Forward Voltage="500 mV", Max Operating Temperature="125 degC", Max Surge Current="80 A", Min Operating Temperature="-55 degC", Package Quantity=5000, Peak Reverse Current="500 uA", ComponentLink1Description="Manufacturer URL", ComponentLink1URL=http://www.diodes.com/, ComponentLink2Description=Datasheet, ComponentLink2URL=http://www.diodes.com/_files/datasheets/ds30891.pdf, DatasheetVersion="Rev. 17 - 2, 09/2015", Elements=1, Height="2.1 mm", Length="4.6 mm", Mount="Surface Mount", Mounting Technology="Surface Mount", PackageDescription="2-Pin Surface Mounted Assembly, Body 4.3 x 2.605 mm, Height 2.4 mm", PackageReference=SMA-2, Packaging="Tape and Reel", Pins=2, Radiation Hardening=No, REACH SVHC="No SVHC", RoHSCompliant=true, Width="2.92 mm"
J1: library part 10118192-0001LF, "CONN USB MICRO B RECPT SMT R/A", Supplier Part Number 1=609-4613-1-ND, HelpURL=http://portal.fciconnect.com/Comergent//fci/drawing/10118192.pdf, Supplier 1=Digi-Key
P1: "CONN HEADER VERT 2POS .100 TIN", Colour=White,Natural,Beige, Contact Resistance=6mR, Current Rating=5A, Flammability Rating="UL94 V-0", Housing Colour=Natural, Manufacturer="TE Connectivity", Max Operating Temperature=221°C, Max Voltage Rating (AC)=250V, Min Operating Temperature=-67°C, Package Quantity=5000, Supplier Part Number 1=A1921-ND, Approvals=CSA, Backwall/Post Interruptions="No (Without)", ComponentLink1Description=https://datasheet.ciiva.com/709/eng-cd-640456-w1-709680.pdf, ComponentLink1URL=https://datasheet.ciiva.com/709/eng-cd-640456-w1-709680.pdf, ComponentLink2Description=https://datasheet.ciiva.com/3118/eng-ds-82056-mta-0608-3118497.pdf, ComponentLink2URL=https://datasheet.ciiva.com/3118/eng-ds-82056-mta-0608-3118497.pdf, ComponentLink3Description=https://datasheet.ciiva.com/19462/613931-19462481.pdf, ComponentLink3URL=https://datasheet.ciiva.com/19462/613931-19462481.pdf, ComponentLink4Description=https://datasheet.ciiva.com/14156/04384301-14156820.pdf, ComponentLink4URL=https://datasheet.ciiva.com/14156/04384301-14156820.pdf, ComponentLink5Description=https://datasheet.ciiva.com/7128/1866390-7128742.pdf, ComponentLink5URL=https://datasheet.ciiva.com/7128/1866390-7128742.pdf, ComponentLink6Description=https://datasheet.ciiva.com/16401/eng-ds-82056-mta-0608-16401289.pdf, ComponentLink6URL=https://datasheet.ciiva.com/16401/eng-ds-82056-mta-0608-16401289.pdf, ComponentLink7Description=https://datasheet.ciiva.com/16505/eng-ds-82056-mta-0608-16505419.pdf, ComponentLink7URL=https://datasheet.ciiva.com/16505/eng-ds-82056-mta-0608-16505419.pdf, ComponentLink8Description=https://datasheet.ciiva.com/25617/0900766b80027008-25617244.pdf, ComponentLink8URL=https://datasheet.ciiva.com/25617/0900766b80027008-25617244.pdf, ComponentLink9Description=https://datasheet.ciiva.com/11746/0900766b80eb7fdd-11746365.pdf, ComponentLink9URL=https://datasheet.ciiva.com/11746/0900766b80eb7fdd-11746365.pdf, Connector System=Wire-to-Board, Connector Type=Plug,Pin,Header, Contact Gender=Male, Contact Material="Copper Alloy", Contact Mating Length=0.295inch, Contact Plating=Tin, Contact Retention="No (Without)", Contact Shape=Square, Contact Style=Straight, Depth=5.72mm, ELV=Compliant, Fastening Type=Friction, Gender=Male, Height=7.87mm, Housing Material=Polyester, Lead Free="Lead Free", Lead Pitch=2.54mm, Length=5.08mm, Manufacturer Part Number=640456-2, Mating Alignment="No (Without)", Mating Post Length=7.49mm, Mating Retention="No (Without)", Max Current Rating=5A, Mount="Through Hole", Number of Contacts=2, Number of Poles=2, Number of Positions=2, Number of Rows=1, Orientation=Straight, Packaging=Bulk, Panel Mount Retention="No (Without)", PCB Mount Alignment="No (Without)", PCB Mounting Orientation=Vertical, PCB Mount Retention=Without, PCB Thickness=0.063inch, Pitch=2.54mm, Plating Thickness=3.81um, Pricing 1="1=0.12, 10=0.117, 100=0.0724, 500=0.0599, 1000=0.0524, 5000=0.0449, 10000=0.0437 (USD)", Radiation Hardening=No, REACH SVHC="No SVHC", Sealable="No (Without)", Stock 1=141304, Strain Relief="No (Without)", Supplier 1=Digi-Key, Tail Length=3.56mm, Termination=Solder, Termination Post Length=3.56mm, Underplate Material=Nickel, Voltage Rating=250V, Voltage Rating (AC)=250V, Working Voltage=250V
P2: library part "Header 3", "Header, 3-Pin", LatestRevisionDate=17-Jul-2002, LatestRevisionNote="Re-released for DXP Platform.", Publisher="Altium Limited"
P3: library part "Header 4", "Header, 4-Pin", LatestRevisionDate=17-Jul-2002, LatestRevisionNote="Re-released for DXP Platform.", Publisher="Altium Limited"
Q1: library part CMP-1058-00743-1, "Power MOSFET, 30 V, 2.5 A, Single N-Channel, 3-Pin SOT-23, Pb-Free, Tape and Reel", Manufacturer="On Semiconductor", Package Type=SOT-23-3, Channel Polarity="N Channel", ComponentLink1Description="Manufacturer URL", ComponentLink1URL=http://www.onsemi.com/, ComponentLink2Description=Datasheet, ComponentLink2URL=http://www.onsemi.cn/pub_link/Collateral/NTR4503N-D.PDF, ComponentLink3Description="Package Specification", ComponentLink3URL=http://www.onsemi.cn/pub_link/Collateral/318-08.PDF, Configuration=Single, DatasheetVersion="Rev. 6", ID Max (A)=2.5, Mounting Technology="Surface Mount", PackageDescription="3-Pin Small Outline Transistor, Body 2.92 x 1.3 mm, Pitch 0.95 mm", PackageReference=SOT-23-3-318-08, PackageVersion="Rev. AP, 11/2009", Packing="Tape and Reel", PartNumber=NVTR4503NT1G, Qrr Typ (nC)=4, RoHS=Pb-Free, V(BR)DSS Min (V)=30, VGS(th) Max (V)=3, VGS Max (V)=20
R1 R4 R7 R11: library part CMP-1013-00528-1, "1K5 0.125W 1% 0805 (2012 Metric)  SMD", Case-EIA=0805, Case-Metric=2012, Power="0.125 W", Tolerance="1 %", Technology=SMT
R2: library part CMP-1013-00515-1, "1K13 0.125W 1% 0805 (2012 Metric)  SMD", Case-EIA=0805, Case-Metric=2012, Power="0.125 W", Tolerance="1 %", Technology=SMT
R3: library part CMP-1013-00517-1, "1K18 0.125W 1% 0805 (2012 Metric)  SMD", Case-EIA=0805, Case-Metric=2012, Power="0.125 W", Tolerance="1 %", Technology=SMT
R5 R17: library part CMP-2100-03615-1, "Chip Resistor, 4.7 KOhm, +/- 1%, 0.125 W, -55 to 155 degC, 0805 (2012 Metric), RoHS, Tape and Reel", Case/Package=0805, Case Code (Metric)=2012, Manufacturer="Vishay Semiconductor", Max Operating Temperature=155degC, Max Power Dissipation=125mW, Min Operating Temperature=-55degC, Package Description="2-Pin Surface Mount Device, Body 2.05 x 1.25 mm", Package Quantity=10, Resistance=4.7KOhm, Temperature Coefficient=100ppm/degreesC, Tolerance=1%, Voltage Rating=150V, Case Code (Imperial)=0805, Composition=ThickFilm, Contact Plating=Tin, Datasheet URL=https://datasheet.ciiva.com/11808/0900766b80d98b26-11808992.pdf, Datasheet Version=41061.0, Depth=1.25mm, Height=0.45mm, Lead Free=LeadFree, Length=2mm, Manufacturer URL=http://www.vishay.com/, Military Standard=Not, Number of Terminations=2, Package Reference=0805, Packaging=TapeandReel, Power Rating=125mW, Radiation Hardening=No, REACH SVHC=Unknown, RoHSCompliant=true, Termination=SMD/SMT, Voltage Rating (DC)=150V, Weight=0.000194oz, Width=1.25mm
R6 R8 R12 R13 R19 R21 R22 R23 R24 R25 R26 R27: library part CMP-1013-00623-1, "10K 0.125W 1% 0805 (2012 Metric)  SMD", Case-EIA=0805, Case-Metric=2012, Power="0.125 W", Tolerance="1 %", Technology=SMT
R9 R14 R15 R16 R28 R29: library part CMP-1013-00736-1, "100K 0.125W 1% 0805 (2012 Metric)  SMD", Case-EIA=0805, Case-Metric=2012, Power="0.125 W", Tolerance="1 %", Technology=SMT
R10 R30 R31: library part CMP-1013-00350-1, "39R 0.125W 1% 0805 (2012 Metric)  SMD", Case-EIA=0805, Case-Metric=2012, Power="0.125 W", Tolerance="1 %", Technology=SMT
R20: library part CMP-1013-00586-1, "4K7 0.125W 1% 0805 (2012 Metric)  SMD", Case-EIA=0805, Case-Metric=2012, Power="0.125 W", Tolerance="1 %", Technology=SMT
TP1 TP2 TP3: library part CMP-0484-00002-2, "Test Point, Surface Mount, Circular, Pad Diameter 1 mm", Manufacturer="No Vendor", PartNumber=TP-SM-C-100
U1: "Imported", Manufacturer="Texas Instruments", Supplier Part Number 1=296-32025-1-ND, Built_By=EMA_UL_Team, C="Copyright (C) 2015 Accelerated Designs. All rights reserved", Manufacturer_Part_Number=BQ24075TRGTR, RefDes=RefDes, Supplier 1=Digi-Key, Type=Type, Vendor=Vendor
U2: "Imported", Supplier Part Number 1=AP7361-33E-13DICT-ND, Built_By=EMA_UL_Team, Manufacturer_Part_Number=AP7361-33E-13, RefDes=RefDes, Supplier 1=Digi-Key, Type=Type, Vendor="Diodes Inc"
U3: "RF TXRX MODULE WIFI TRACE ANT", Current - Receiving=-, Frequency=2.4GHz, Manufacturer=Atmel, Manufacturer Part Number=ATSAMW25H18-MR510PB, Operating Temperature="-40°C ~ 85°C", Package / Case=Module, Power - Output=17dBm, Supplier Part Number 1=ATSAMW25H18-MR510PB-ND, Voltage - Supply="2.7 V ~ 4.2 V", Antenna Type="Integrated, Trace", Category="RF/IF and RFID", ComponentLink1Description=http://www.atmel.com/devices/ATSAMW25.aspx, ComponentLink1URL=http://www.atmel.com/devices/ATSAMW25.aspx, ComponentLink2Description=http://www.farnell.com/datasheets/1965115.pdf, ComponentLink2URL=http://www.farnell.com/datasheets/1965115.pdf, Current - Transmitting=-, Data Rate=65Mbps, Family="RF Transceiver Modules", Memory Size="256kB Flash, 32kB SRAM", Modulation=-, Mounting Type="Surface Mount", Packaging=Tray, Pricing 1="1=19.14 (USD)", Protocol=802.11b/g/n, RF Family/Standard=WiFi, Sensitivity=-95.5dBm, Serial Interfaces="SPI, UART", Series="Xplained Pro", Stock 1=120, Supplier 1=Digikey
U4: library part CMP-0326-00038-3, "USB ESD Solution with Power Clamp, 4 Channels, -40 to +85 degC, 6-pin SON (DRY), Green (RoHS & no Sb/Br)", Breakdown Voltage(Min)(V)=6, IO Capacitance(Typ)(pF)=0.8, IO Leakage Current(nA)=10, Manufacturer="Texas Instruments", ComponentLink1Description="Manufacturer URL", ComponentLink1URL=http://www.ti.com/, ComponentLink2Description=Datasheet, ComponentLink2URL=http://www.ti.com/general/docs/lit/getliterature.tsp?genericPartNumber=TPD4S012&fileType=pdf, ComponentLink3Description="URL Link1", ComponentLink3URL=SamplesURL:http://www.ti.com/product/tpd4s012#samples, DatasheetVersion=SLVS928A, Eco-Plan="Green (RoHS & no Sb/Br)", IEC 61000-4-2 Air-Gap(+/- kV)=10, IEC 61000-4-2 Contact(+/- kV)=10, Mounting Technology="Surface Mount", PackageDescription="6-Pin Plastic Small Outline No-Lead, 1 x 1.45 x 0.6 mm Body, 0.5 mm Pitch", PackageReference=DRY0006A, PackageVersion="revF, Dec-2011", PartNumber=TPD4S012DRYR, SubFamily="ESD Solution", USB High Speed=TRUE
U5: library part CMP-2000-05029-1, "IC USB FS SERIAL UART 28-SSOP", Manufacturer=FTDI, Maximum Operating Temperature=+85degC, Minimum Operating Temperature=-40degC, Package Type=SSOP, Datasheet URL=http://datasheet.octopart.com/FT232RL-FTDI-datasheet-120501.pdf, Datasheet Version="Rev. 1.04, 02/2006", Dimensions=10.2x5.3x1.75mm, Height=1.75mm, Length=10.2mm, Manufacturer URL=http://www.ftdichip.com/, Maximum Data Rate=3MBd, Mounting Type=SurfaceMount, Number of Channels per Chip=1, Pin Count=28, Receive FIFO=256B, Transmit FIFO=128B, Width=5.3mm
U6: "IC FLASH 8MBIT 100MHZ 8SOIC", Manufacturer="Adesto Technologies", Operating Temperature="-40°C ~ 85°C (TC)", Package=8SOIC, Package / Case="8-SOIC (0.154\", 3.90mm Width)", Supplier Device Package=8-SOIC, Supplier Part Number 1=1265-1166-1-ND, Voltage - Supply="2.7 V ~ 3.6 V", Category="Integrated Circuits (ICs)", ComponentLink1Description=http://www.adestotech.com/wp-content/uploads/doc8715.pdf, ComponentLink1URL=http://www.adestotech.com/wp-content/uploads/doc8715.pdf, ComponentLink2Description=https://datasheet.ciiva.com/14084/doc8715-14084443.pdf, ComponentLink2URL=https://datasheet.ciiva.com/14084/doc8715-14084443.pdf, ComponentLink3Description=https://datasheet.ciiva.com/26910/getdatasheetpartid-730210-26910875.pdf, ComponentLink3URL=https://datasheet.ciiva.com/26910/getdatasheetpartid-730210-26910875.pdf, ComponentLink4Description=https://datasheet.ciiva.com/12251/doc8715-12251468.pdf, ComponentLink4URL=https://datasheet.ciiva.com/12251/doc8715-12251468.pdf, Format - Memory=FLASH, Interface="SPI, RapidS", Manufacturer Part Number=AT25DF081A-SSH-T, Memory Size="8M (4096 pages x 256 bytes)", Memory Type=FLASH, Packaging="Cut Tape (CT)", Part Status=Active, Pricing 1="1=1.18, 10=1.081, 25=1.0516, 50=1.0462, 100=0.9352, 250=0.9324, 500=0.9185, 1000=0.8791 (USD)", Rad Hard=No, RoHS="RoHS Compliant", Speed=100MHz, Stock 1=2550, Supplier 1=Digikey
U7: library part CMP-2000-07443-1, "Ultra-Low Power Digital Gas Sensor for Monitoring Indoor Air Quality, 26 mA, 1.8 to 3.3 V, -5 to 50 degC, 10-Pin LGA, RoHS", Manufacturer=AMS, Package Description="10-Pin Small Outline Non-lead, Body 4 x 2.7 mm, Pitch 0.6 mm", Package Reference=LGA-10, Datasheet URL=http://ams.com/eng/content/download/951091/2269479/471718, Datasheet Version="Rev. 1-02, 03/2017", Manufacturer URL=http://www.ams.org/home/page, Mounting Technology=SurfaceMount, RoHSCompliant=false
U8: library part CMP-0192-00343-1, "+ / - 0.5 degC Maximum Accuracy Digital Temperature Sensor, 400 uA, 2.7 to 5.5 V, -40 to 125 degC, 8-pin MSOP (MS8), Tape and Reel", Manufacturer=Microchip, ComponentLink1Description="Manufacturer URL", ComponentLink1URL=http://www.microchip.com, ComponentLink2Description=Datasheet, ComponentLink2URL=http://ww1.microchip.com/downloads/en/DeviceDoc/25095A.pdf, ComponentLink3Description="Package Specification", ComponentLink3URL=http://www.microchip.com/stellent/groups/techpub_sg/documents/packagingspec/en012702.pdf, ComponentLink4Description="Product URL", ComponentLink4URL=http://www.microchip.com/MCP9808, DatasheetVersion="Rev. A", Mounting Technology="Surface Mount", PackageDescription="8-Lead Plastic Micro Small Outline Package, 3 x 3 mm Body, 0.65 mm Pitch", PackageReference=MSOP-MS8, PackageVersion=C04-111C, PartNumber=MCP9808T-E/MS
U9: "CONN HEADER 10POS UNSHD VERT T/H", Current Rating="10 A", Manufacturer="Amphenol / FCI", Supplier Part Number 1=609-3712-ND, Voltage Rating="125 V", Brand=FCI, ComponentLink1Description=https://datasheet.ciiva.com/1433/1079612-1433267.pdf, ComponentLink1URL=https://datasheet.ciiva.com/1433/1079612-1433267.pdf, ComponentLink2Description=https://datasheet.ciiva.com/409/20021111-409158.pdf, ComponentLink2URL=https://datasheet.ciiva.com/409/20021111-409158.pdf, ComponentLink3Description=https://datasheet.ciiva.com/5131/20021111-5131386.pdf, ComponentLink3URL=https://datasheet.ciiva.com/5131/20021111-5131386.pdf, ComponentLink4Description=https://datasheet.ciiva.com/9465/20021111-9465402.pdf, ComponentLink4URL=https://datasheet.ciiva.com/9465/20021111-9465402.pdf, Contact Material=Nickel, Contact Plating=Gold, Factory Pack Quantity=93, Housing Material=Plastic, Manufacturer Part Number=20021111-00010T4LF, Mating Post Length="3.05 mm", Mounting Angle=Vertical, Mounting Style="Through Hole", Number of Positions=10, Number of Positions / Contacts=10, Number of Rows=2, Packaging=Tube, Pitch="1.27 mm", Product Category="Headers & Wire Housings", Product Type=Headers, RoHS=Details, Series=Minitek, Stack Height="2.5 mm", Supplier 1=Digi-Key, Termination Post Length="2.3 mm", Termination Style="Through Hole", Type=Unshrouded

## Via types
v1: diameter 20, hole 10, Top Layer to Bottom Layer, 142 vias
v2: diameter 19.68, hole 7.87, Top Layer to Bottom Layer, 2 vias
v3: diameter 20, hole 8, Top Layer to Bottom Layer, 2 vias

## Nets (pads, with @x,y where several pads share a name; then routed paths per layer and width w, separated by ;. In a path a pad name is that pad's centre, name@x,y a point inside that pad or via, vN(x,y) a via of type N, cw(c..) or ccw(c..) an arc to the next point about the centre after c; other vN are vias at no path point)
3.3Vout: C5.2 C6.2 C7.2 C12.2 P2.1 R5.2 R8.2 R9.1 R14.1 R15.1 R16.1 R17.2 R21.2 R22.2 R28.1 R29.1 U2.3 U3.7 U3.21 U6.8 U7.6 U8.8 U9.1 | length 2608.9
  Top Layer w8: U7.6 v1(8835,8500)
  Top Layer w10: v1(7205,8010) 7217.28,8010 ; C12.2@7220,7599.37 C12.2 7274.37,7545 v1(7310,7545) 7358.47,7593.47 R14.1 R15.1 R15.1@7430,7640 ; U9.1 7230,7345 7245,7360 v1(7275,7360) ; U6.8 7217.28,8010 ; R16.1 7238.07,8010 7217.28,8010 ; v1(7410,7350) 7411.5,7348.5 C7.2 7485,7255 7503.94,7236.06 U3.21 ; C6.2 7525,7967.01 v1(7525,7910) U3.7@7597.06,7910 ; R5.2 8642.68,8100 v1(8675,8100) ; R9.1 8673.66,8240.2 R22.2 8673.66,8101.34 v1(8675,8100) ; R17.2 8738.66,8100 v1(8675,8100) ; v1(8805,7030) 8826.54,7030 R28.1 ; R29.1 8936.54,6555 8990,6555 9008.5,6536.5 C5.2 8995,6381.5 v1(8995,6270) 8984.09,6280.91 U2.3 ; U8.8 9256.26,8495 v1(9300,8495) ; R8.2 9370,7807.68 v1(9430,7747.68) 9380,7747.68 R21.2 ; P2.1 9395,8240 v1(9395,8165)
5Vin: C3.2 C4.2 D5.1 R1.2 R4.2 U1.5 U1.10 U1.11 U2.1 | length 2816.5
  Top Layer w8.27: U1.11 7445.2,6800 ; U1.10@7453.86,6800 U1.10 7459.37,6816.73 ; U1.5 U1.5@7513.11,6712.39
  Top Layer w10: 7445.2,6800 U1.10@7453.86,6800 ; 7459.37,6816.73 7459.37,6840.93 7459,6841.3 7459,6904 7470,6915 7575,6915 ; U1.5@7513.11,6712.39 7542.09,6712.39 7575,6745.3 7575,6915 ; R1.2 7652.32,6447.68 7805,6447.68 ; v1(7805,6475) 7805,6447.68 ; v1(7805,6620) 7805,6775 7783.5,6796.5 C3.2 7740,6875 7700,6915 7575,6915 ; v1(8050,6330) 7932.32,6447.68 R4.2 7805,6447.68 ; v1(8551.5,6330) C4.2@8611.5,6390 ; v1(8555,6390) C4.2@8611.5,6390 ; v1(8560,6515) 8560,6550 8625,6615 D5.1 ; U2.1 8620.91,6280.91 8620.91,6387.6 C4.2 C4.2@8611.5,6390
  Bottom Layer w10: v1(7805,6475) v1(7805,6620) ; v1(8050,6330) v1(8551.5,6330) ; v1(8555,6390) 8560,6395 v1(8560,6515)
CCS_addr: R23.2 U7.1 | length 137.3
  Top Layer w10: U7.1 8919.06,8350 8975,8350 8975,8339.7 8974,8338.7 8974,8284.66 R23.2
CCS_IRQ: R21.1 U3.40 U7.3 | length 2277.5
  Top Layer w10: U3.40 8189.25,7670.75 8205,7655 v1(8435,7655) ; U7.3 9008.62,8398.62 9008.62,8379.01 9011,8376.63 9011,8359 9025,8345 9025,8246.65 9012.82,8234.47 9004.47,8234.47 9000,8230 9000,7870 9280,7590 R21.1 9300,7585 v1(9170,7585)
  Bottom Layer w10: v1(8435,7655) 8765,7655 8835,7585 v1(9170,7585)
CCS_reset: R22.1 U7.2 | length 414
  Top Layer w10: R22.1 8765,8195 v1(8805,8235) ; U7.2 8990,8375 8995,8370 v1(8995,8330)
  Bottom Layer w10: v1(8805,8235) 8875,8305 8970,8305 v1(8995,8330)
Chg: D1.1 U1.9 | length 983.5
  Top Layer w8.27: U1.9 7480,6800.94 7480,6816.73
  Top Layer w10: 7480,6816.73 v1(7480,6850) ; v1(7530,6490) 7530,6318.66 D1.1
  Bottom Layer w10: v1(7480,6850) 7480,6885 7345,6885 7345,6580 7394,6531 7398.7,6531 7411,6518.7 7411,6514 7435,6490 v1(7530,6490)
ChipEn: TP3.1 U3.4 | length 446.9
  Top Layer w10: TP3.1 7390,8210 7520.3,8079.7 7536.13,8079.7 7567.13,8048.7 U3.4
Gnd: B1.1 B1.2 B2.1 B2.2 B3.1 B3.2 C1.1 C2.1 C3.1 C4.1 C5.1 C6.1 C7.1 C8.1 C9.1 C10.1 C11.1 C12.1 C13.1 C14.1 C15.1 D3.1 D4.1 J1.4 J1.5 J1.6 P1.2 P2.3 Q1.2 R2.2 R3.2 R6.1 R19.1 R23.1 R24.1 R25.1 R26.1 R27.1 U1.4 U1.6 U1.8 U1.14 U1.15 U1.17 U2.2 U2.4 U3.0 U3.1 U3.10 U3.17 U3.20 U3.32 U3.42 U3.51 U4.3 U4.4 U5.7 U5.18 U5.21 U5.25 U5.26 U6.4 U7.7 U7.11 U8.4 U9.3 U9.5 U9.9 | length 8435.9
  Top Layer w8: 8807.24,8422.24 U7.7 8876.34,8422.24 v2(8876.34,8418.31) U7.11 v2(8876.34,8378.94)
  Top Layer w8.27: U1.15 7391.46,6737.6 ; U1.14@7391.46,6746.26 U1.14 7393.23,6750 7408.19,6750 ; U1.4 7479.06,6700.59 ; U1.6@7490.87,6732.08 U1.6 ; U1.8@7502.09,6771.46 U1.8 7513.11,6776.98
  Top Layer w8.86: U4.3 8321.07,6468.93 ; U4.4 U4.4@8319.68,6510
  Top Layer w10: v1(7190,7365) 7190,7250 7195,7245 U9.3 ; R3.2 7218.66,6798.66 v1(7205,6785) 7205,6776.34 R6.1 ; C12.1 7235,7505.63 v1(7235,7440) ; P1.2 v1(7250,6545) ; 7391.46,6737.6 U1.14@7391.46,6746.26 ; 7408.19,6750 7441.46,6750 U1.17 ; U6.4 7477.28,7737.72 v1(7495,7720) 7498.23,7723.23 7513.23,7723.23 7555.24,7765.24 U3.10 ; v1(7430,8055) 7435,8050 C6.1 ; 7479.06,6700.59 7479.06,6712.4 U1.17@7459.37,6732.08 ; U1.6@7490.87,6732.08 U1.17@7459.37,6732.08 ; v1(7500,6600) v1@7503.46,6596.54 ; U1.8@7502.09,6771.46 7489.49,6771.46 7483.02,6765 7472.6,6765 U1.17 ; R2.2 v1@7503.46,6596.54 ; v1(7510,7465) 7485,7440 C7.1 7485,7395 7501.8,7378.2 7516.13,7378.2 7517.78,7379.85 v1(7545,7379.85) ; 7513.11,6776.98 7540,6803.87 v1(7540,6815) ; v1(7540,8200) 7549.57,8190.43 U3.1 7658.66,8190.43 7819.09,8030 7905,8030 7905,7942.68 U3.0@7819.09,7942.68 ; C2.1 7505,6595 v1@7503.46,6596.54 ; U3.20 7587.2,7292.8 7545,7335 v1(7545,7379.85) ; v1(7605,6775) 7605,6766.5 C1.1 7637.99,6733.5 C3.1 7745,6728.5 C15.1 ; U3.0@7896.89,7435.08 7896.89,7547.48 7781.77,7547.48 7781.77,7435.08 7780.69,7434 7600.62,7434 U3.17 7554.53,7434.53 7545,7425 v1(7545,7379.85) ; v1(8055,7290) 8057.8,7292.8 U3.32 ; U3.42 8204.76,7765.24 v1(8210,7760) ; U3.51 8220.43,8190.43 v1(8270,8240) ; J1.6@8167.95,6365.08 8167.95,6292.24 8140.39,6264.69 8242.76,6264.69 8337.24,6264.69 8439.61,6264.69 8412.05,6292.24 8412.05,6365.08 8346.1,6365.08 J1.5 ; U5.18 8237.64,6862.64 8239.41,6864.41 8314.41,6864.41 ; U5.21 8314.41,6864.41 ; U4.4 8315.32,6505 v1(8355,6505) ; J1.4 J1.5 ; 8321.07,6468.93 8326.38,6463.62 8331.99,6463.62 8360.61,6435 v3(8365,6435) 8341.18,6411.18 J1.5 ; C9.1 8273.5,8240 v1(8270,8240) ; B1.2 8270,8255.12 v1(8270,8240) ; U5.7 8340,6865 ; U5.25 8416.77,6861.77 v1(8420,6865) ; U5.26 8442.36,6862.64 8440,6865 v1(8420,6865) ; v1(8455,7690) 8526.34,7690 R27.1 ; v1(8555,6625) 8554.37,6625 C10.1 8491.5,6562.13 C11.1 8586.5,6485 C4.1 8677.6,6519.09 U2.4 U2.2 ; B1.1 8640,8357.4 v1(8640,8380) ; v1(8630,7370) 8631.26,7371.26 Q1.2 ; R19.1 8801.34,7568.66 v1(8810,7560) ; C8.1 8740,7145.63 v1(8740,7235) ; v1(8800,8415) 8807.24,8422.24 ; C14.1 9056.5,6608.5 v1(9060,6605) ; C13.1 9052.24,6996.26 B2.2 9141.14,6986.26 9141.14,6923.86 9268.86,6923.86 v1(9270,6925) 9420,6925 9420,6985.12 B2.1@9408.86,6996.26 ; R26.1 9147.32,8093.66 R24.1 9158.66,8163.66 R25.1 9240,8245 v1(9300,8245) ; U8.4 9065,8386.97 v1(9065,8345) 9065,8276.34 R23.1 ; C5.1 9071.5,6411.5 v3(9120,6460) ; B3.2@9146.14,6691.26 9120,6665.12 v3(9120,6460) ; D3.1 9178.66,6400 D4.1 9120,6458.66 v3(9120,6460) ; P2.3 9385,8475 9405,8495 v1(9460,8495) ; B3.1@9413.86,6691.26 9445,6660.12 v1(9445,6600) ; U1.17 U1.17@7459.37,6732.08 ; 8314.41,6864.41 8315,6865 8340,6865 ; 8340,6865 v1(8420,6865)
  other v1: 7745,8200 7835,8200 7925,8200 8020,8205 8205,8215 7450,8280 7445,8340 8275,8380 7445,8395 8275,8425 7445,8445 7445,8490 8280,8510
MCP_A0: R24.2 U8.7 | length 497.6
  Top Layer w10: U8.7 9312.8,8442.8 9312.8,8429.83 9321,8421.63 9321,8116 9310,8105 R24.2
MCP_A1: R25.2 U8.6 | length 242.5
  Top Layer w10: U8.6 9232.44,8420 9300,8420 9300,8320 9297.68,8317.68 R25.2
MCP_A2: R26.2 U8.5 | length 350.5
  Top Layer w10: R26.2 9045,8230 9049.47,8234.47 9095.5,8234.47 9101.94,8240.92 9101.94,8286.94 9175.35,8360.35 9229.65,8360.35 U8.5
MCP_IRQ: R8.1 U3.33 U8.3 | length 2180.4
  Top Layer w10: U3.33 8930.04,7340.04 9135,7545 v1(9135,7665) ; U8.3 9127.8,8417.2 9130,8415 v1(9130,8345) ; v1(9165,7805) 9215.98,7805 R8.1 9218.66,7728.66 v1(9210,7720)
  Bottom Layer w10: v1(9130,8345) 9140,8335 9140,7830 v1(9165,7805) ; v1(9135,7665) 9140,7670 9140,7720 v1(9210,7720)
NetB1_3: B1.3 B1.4 R10.2 | length 503.2
  Top Layer w10: B1.4 B1.3 8640.12,8515 8760,8515 8772.4,8502.6 R10.2
NetB2_3: B2.3 B2.4 R30.2 | length 503.7
  Top Layer w10: R30.2 8938.66,7153.74 9120,7155 9131.15,7154.95 B2.3 B2.3@9408.86,7153.74
NetB3_3: B3.3 B3.4 R31.2 | length 443.7
  Top Layer w10: R31.2 9003.66,6848.74 B3.4 B3.3 B3.3@9413.86,6848.74
NetC13_2: C13.2 R28.2 R30.1 U3.22 | length 1715.3
  Top Layer w10: U3.22 7674.74,7190.26 v1(7675,7190) ; v1(7920,7175) 8080,7015 v1(8080,6945) ; v1(8705,6950) 8784,7029 8784,7038.7 8835.3,7090 8902.4,7090 R30.1 ; R28.2 8923.46,7094.13 R30.1 ; C13.2 9008.9,7102.6 R30.1
  Bottom Layer w10: v1(7675,7190) 7905,7190 v1(7920,7175) ; v1(8080,6945) 8700,6945 v1(8705,6950)
NetC14_2: C14.2 R29.2 R31.1 U3.23 | length 2383.3
  Top Layer w10: v1(7450,7095) 7510,7035 7665,7035 7885,6815 v1(8055,6815) ; U3.23 7725,7239.08 v1(7725,7280) ; v1(8735,6800) 8737.4,6797.6 R31.1 8980,6681.5 C14.2@8983.03,6678.46 ; R29.2 C14.2@8983.03,6678.46 ; C14.2 C14.2@8983.03,6678.46
  Bottom Layer w10: v1(7450,7095) 7400,7145 7525,7270 7715,7270 v1(7725,7280) ; v1(8055,6815) 8070,6800 v1(8735,6800)
NetD1_2: D1.2 R1.1 | length 94.9
  Top Layer w10: R1.1 7656.34,6360.99 D1.2
NetD2_2: D2.2 R4.1 | length 98.6
  Top Layer w10: D2.2 7880,6278.66 R4.1
NetD3_2: D3.2 R7.1 | length 149.2
  Top Layer w10: D3.2 9262.68,6278.66 R7.1
NetD4_2: D4.2 R11.1 | length 168.8
  Top Layer w10: D4.2 9305,6453.66 R11.1
NetD5_2: D5.2 P3.2 | length 1165.1
  Top Layer w10: D5.2 8627.52,6865 v1(8720,6865) ; v1(8815,7375) 8820,7380 8915,7380 9040,7505 9040,7635 P3.2
  Bottom Layer w10: v1(8720,6865) 8726,6871 8726,6958.7 8725,6959.7 8725,7025 8815,7115 v1(8815,7375)
NetP2_2: P2.2 U3.41 | length 1848.3
  Top Layer w10: U3.41 8129.66,7720 8480,7720 8680,7920 8845,7920 v1(8930,8005) ; v1(9030,8010) 9445,8010 9445,8350 P2.2
  Bottom Layer w10: v1(8930,8005) 8925,8010 v1(9030,8010)
NetP3_1: P3.1 U3.9 | length 1623.7
  Top Layer w10: U3.9 8017.48,7812.48 v1(8055,7850) ; v1(8860,7625) 8860,7530 8925,7530 P3.1
  Bottom Layer w10: v1(8055,7850) 8140,7935 8480,7935 8705,7710 8805,7710 8860,7655 v1(8860,7625)
NetP3_4: P3.4 R12.2 | length 228
  Top Layer w10: R12.2 8898.66,7866.34 P3.4
NetQ1_1: Q1.1 R20.1 R27.2 | length 227.7
  Top Layer w10: R27.2 8555,7533.66 R20.1 8513.94,7487.4 Q1.1
NetR2_1: R2.1 U1.16 | length 186.4
  Top Layer w8.27: U1.16@7385.94,6706.88 U1.16
  Top Layer w10: v1(7385,6680) 7385,6705.94 U1.16@7385.94,6706.88 ; v1(7405,6600) 7405,6581.54 R2.1
  Bottom Layer w10: v1(7385,6680) 7385,6620 v1(7405,6600)
NetR3_1: R3.1 U1.12 | length 173.7
  Top Layer w8.27: U1.12 U1.12@7420,6816.73
  Top Layer w10: R3.1 7420,6855 U1.12@7420,6816.73
NetR6_2: R6.2 U1.1 | length 184.6
  Top Layer w8.27: 7414.49,6678.35 U1.1
  Top Layer w10: R6.2 7384.8,6648.66 7414.49,6678.35
NetR7_2: R7.2 U3.36 | length 2816.4
  Top Layer w10: v1(7955,6600) v1(7955,6660) ; v1(8030,7465) 8110.88,7465 U3.36 ; v1(9330,6350) 9398.66,6350 R7.2
  Bottom Layer w10: v1(7955,6600) 7955,6285 7950,6280 8975.3,6280 9045.3,6350 v1(9330,6350) ; v1(7955,6660) 7955,7390 v1(8030,7465)
NetR11_2: R11.2 U3.35 | length 2584.5
  Top Layer w10: v1(8015,6600) 8015,6690 v1(8020,6695) ; v1(8030,7425) 8039.53,7434.53 U3.35 ; v1(9316.34,6536.34) R11.2
  Bottom Layer w10: v1(8015,6600) 8015,6435 8055,6395 8520.3,6395 8546.3,6369 8709,6369 8876.34,6536.34 v1(9316.34,6536.34) ; v1(8020,6695) 8020,7415 v1(8030,7425)
NetR12_1: R12.1 R19.2 U3.31 | length 1129.2
  Top Layer w10: U3.31 8136,7200 v1(8545,7200) ; v1(8585,7525) 8585,7535 8665,7615 8683.66,7615 R19.2 8720,7778.66 R12.1
  Bottom Layer w10: v1(8545,7200) 8585,7240 v1(8585,7525)
NetR13_1: R13.1 U5.14 | length 225.7
  Top Layer w10: U5.14 8160.87,7140.87 8262.8,7140.87 R13.1
NetR15_2: R15.2 U6.3 | length 180.3
  Top Layer w10: U6.3 7422.72,7690 7480,7690 7485,7685 7485,7648.46 R15.2
NetR16_2: R16.2 U6.7 | length 120.1
  Top Layer w10: U6.7 7355,7982.28 R16.2
NetR20_2: R20.2 U3.27 | length 693.1
  Top Layer w10: U3.27 7910.96,7355.96 7915,7360 v1(8045,7360) ; v1(8230,7390) 8328.66,7390 R20.2
  Bottom Layer w10: v1(8045,7360) 8200,7360 v1(8230,7390)
NetU3_25: U3.25 U9.4 | length 713.5
  Top Layer w10: U9.4 7420,7245 7555,7110 v1(7560,7115) ; v1(7816.47,7118.53) U3.25
  Bottom Layer w10: v1(7560,7115) 7563.53,7118.53 v1(7816.47,7118.53)
NetU3_26: U3.26 U9.2 | length 817.3
  Top Layer w10: U9.2 7415,7295 7616,7094 7828.7,7094 7829.7,7095 7870,7095 7870,7229.78 U3.26
NetU7_4: U7.4 U7.5
Pgood: D2.1 U1.7 | length 726.1
  Top Layer w8.27: U1.7 7509.37,6750 7524.33,6750
  Top Layer w10: 7524.33,6750 v1(7550,6750) ; v1(7728.66,6330) D2.1
  Bottom Layer w10: v1(7550,6750) 7550,6504.7 7551,6503.7 7551,6330 v1(7728.66,6330)
RX_Test: TP2.1 U3.3 | length 460.5
  Top Layer w10: TP2.1 7340,8290 7534.06,8095.94 U3.3
SCL: R17.1 U3.39 U7.10 U8.2 | length 1752.1
  Top Layer w10: U3.39 8131.16,7620 v1(8290,7620) ; v1(8290,7745) 8482.37,7745 8673.37,7936 8801,7936 8846.34,7981.34 R17.1 8846.34,8268.66 8795,8320 v1(8795,8345) 8801.38,8351.38 U7.10 ; v1(8955,8440) 8957.8,8442.8 U8.2
  Bottom Layer w10: v1(8290,7620) v1(8290,7745) ; v1(8795,8345) 8795,8335 8955,8335 v1(8955,8440)
SDA: R5.1 U3.38 U7.9 U8.1 | length 1678
  Top Layer w10: U3.38 8133.91,7570 8325,7570 v1(8370,7615) ; v1(8370,7780) 8370,8020 R5.1 8505,8210 8550,8255 8635,8255 8680,8300 v1(8680,8305) ; v1(8795,8375) U7.9 ; v1(8951.61,8468.39) U8.1
  Bottom Layer w10: v1(8370,7615) v1(8370,7780) ; v1(8680,8305) 8725,8350 8770,8350 v1(8795,8375) 8795,8390.3 8779,8406.3 8779,8435.77 8811.61,8468.39 v1(8951.61,8468.39)
Servo_Gnd: P3.3 Q1.3 | length 498.3
  Top Layer w10: Q1.3 8715,7445 8840,7445 8840,7615.3 8839,7616.3 8839,7709 8865,7735 P3.3
SPI_SCK: U3.12 U6.6 | length 417.9
  Top Layer w10: U6.6 7495,7832.28 v1(7495,7825) ; v1(7525,7675) 7529.25,7670.75 U3.12
  Bottom Layer w10: v1(7495,7825) 7495,7760 7516,7739 7516,7711.3 7514,7709.3 7519,7704.3 7519,7681 v1(7525,7675)
SPI_SI: U3.11 U6.5 | length 337.3
  Top Layer w10: U6.5 7535,7842.28 v1(7535,7825) ; v1(7547.99,7717.99) U3.11
  Bottom Layer w10: v1(7535,7825) 7535,7775 7547.99,7762.01 v1(7547.99,7717.99)
SPI_SO: U3.8 U6.2 | length 366
  Top Layer w10: U6.2 7325,7785 v1(7415,7875) ; v1(7545,7875) 7560.28,7859.72 U3.8
  Bottom Layer w10: v1(7415,7875) v1(7545,7875)
SPI_SS: R14.2 U3.37 U6.1 | length 1085.5
  Top Layer w10: U6.1 7275,7656.54 R14.2 7291.54,7593.46 v1(7295,7590) ; v1(8055,7525) 8059.02,7529.02 U3.37
  Bottom Layer w10: v1(7295,7590) 7680,7590 7720,7630 8010,7630 8055,7585 v1(8055,7525)
TARGET_RESET: C9.2 R9.2 R10.1 U3.24 U9.10 | length 2721.8
  Top Layer w10: U9.10 7405,7095 v1(7470,7160) ; v1(7770,7355) 7769.23,7354.23 U3.24 7769.23,7170.77 v1(7775,7165) ; v1(7775,7605) v1(7775,7665) ; v1(8390,8125) 8390,8186.5 C9.2 8430,8190 8485,8245 8485,8405 8490,8410 8670,8410 8721.54,8358.46 R9.2 8697.6,8385.87 R10.1
  Bottom Layer w10: v1(7470,7160) 7475,7165 v1(7775,7165) ; v1(7770,7355) 7705,7420 7705,7535 v1(7775,7605) ; v1(7775,7665) 8060,7950 8060,8120 8385,8120 v1(8390,8125)
TX_Test: TP1.1 U3.2 | length 517.7
  Top Layer w10: TP1.1 7300,8385 7541.81,8143.19 U3.2 7581.63,8161.65 7570.26,8161.65
UART_RX: U3.43 U5.5 | length 1035.1
  Top Layer w10: U3.43 8257.52,7812.48 v1(8260,7810) ; v1(8385,7080) 8391.18,7073.82 U5.5
  Bottom Layer w10: v1(8260,7810) 8260,7240 8355,7240 8385,7210 v1(8385,7080)
UART_TX: U3.44 U5.1 | length 1109
  Top Layer w10: U3.44 8325.28,7859.72 v1(8325,7859.45) ; v1(8490,7085) 8493.54,7081.46 U5.1
  Bottom Layer w10: v1(8325,7859.45) 8325,7500 8490,7335 v1(8490,7085)
USB_DM: J1.2 U4.2 U5.16 | length 521.4
  Top Layer w8.86: 8295.32,6465.19 8295.32,6465.35 U4.2
  Top Layer w10: v1(8185,6575) 8185,6723.54 U5.16 ; J1.2 8264.41,6426.18 8295.32,6457.09 8295.32,6465.19 ; U4.2@8295.32,6465.35 8298.09,6462.58 8298.09,6454.35 8306.32,6454.35 8318.05,6442.62 v1(8323.29,6442.62)
  Bottom Layer w10: v1(8185,6575) 8185,6580.91 8219.91,6546 8235.77,6546 8251,6530.77 8251,6514.91 v1(8323.29,6442.62)
USB_DP: J1.3 U4.1 U5.15 | length 485.6
  Top Layer w8.86: 8269.56,6475.59 U4.1
  Top Layer w10: U5.15 8160.46,6724.59 8160.46,6544.54 8225,6480 v1@8225,6465 ; v1(8225,6460) v1@8225,6465 ; 8269.56,6475.59 8235.59,6475.59 v1@8225,6465 ; J1.3 8295,6375 v1(8295,6420)
  Bottom Layer w10: v1(8225,6460) 8255,6460 v1(8295,6420)
USB_VCC: C2.2 C10.2 C11.2 C15.2 J1.1 U1.13 U4.6 U5.20 | length 2161.4
  Top Layer w8.27: 7374.72,6771.46 U1.13
  Top Layer w8.86: U4.6 8275.63,6515.12
  Top Layer w10: v1(7310,6765) 7316.46,6771.46 7374.72,6771.46 ; v1(7390,6510) 7391,6511 7543.7,6511 7544.7,6510 7645,6510 C2.2 7676.5,6563.5 C15.2 7783.5,6563.5 v1(7845,6625) ; v1(8185,6470) 8185,6442.86 8220.29,6407.57 8220.29,6388.53 J1.1 ; v1(8225,6520) 8240,6535 8275,6535 ; v1(8225,6625) 8288.82,6625 ; 8275.63,6515.12 8275.63,6534.37 8275,6535 ; U5.20 8288.82,6625 ; C11.2 8428.5,6562.13 C10.2 8360,6570 8325,6535 8275,6535 ; 8275,6535 8288.82,6548.82 8288.82,6625
  Bottom Layer w10: v1(7310,6765) 7310,6510 v1(7390,6510) ; v1(7845,6625) v1(8225,6625) ; v1(8185,6470) 8185,6480 v1(8225,6520)
VBatt: C1.2 P1.1 U1.2 U1.3 | length 574.5
  Top Layer w8.27: 7439.69,6667.13 U1.2 7445.2,6683.86 ; U1.3@7453.86,6683.86 U1.3 7459.37,6667.13